# Altium PCB vp40_base_board.PcbDoc (part 1 of 5)
Units mil, origin at the board's own origin, x right, y up, seen from the top; angles counter-clockwise.
Board outline 8267.72 x 4330.71 mil, 4 copper layers (Top Layer, Internal Plane 1, Internal Plane 2, Bottom Layer), stack 30.635 mil thick; 531 components, 391 nets, 1969 pads, 1352 vias.
Unrouted connection lines stored in the file: 302.
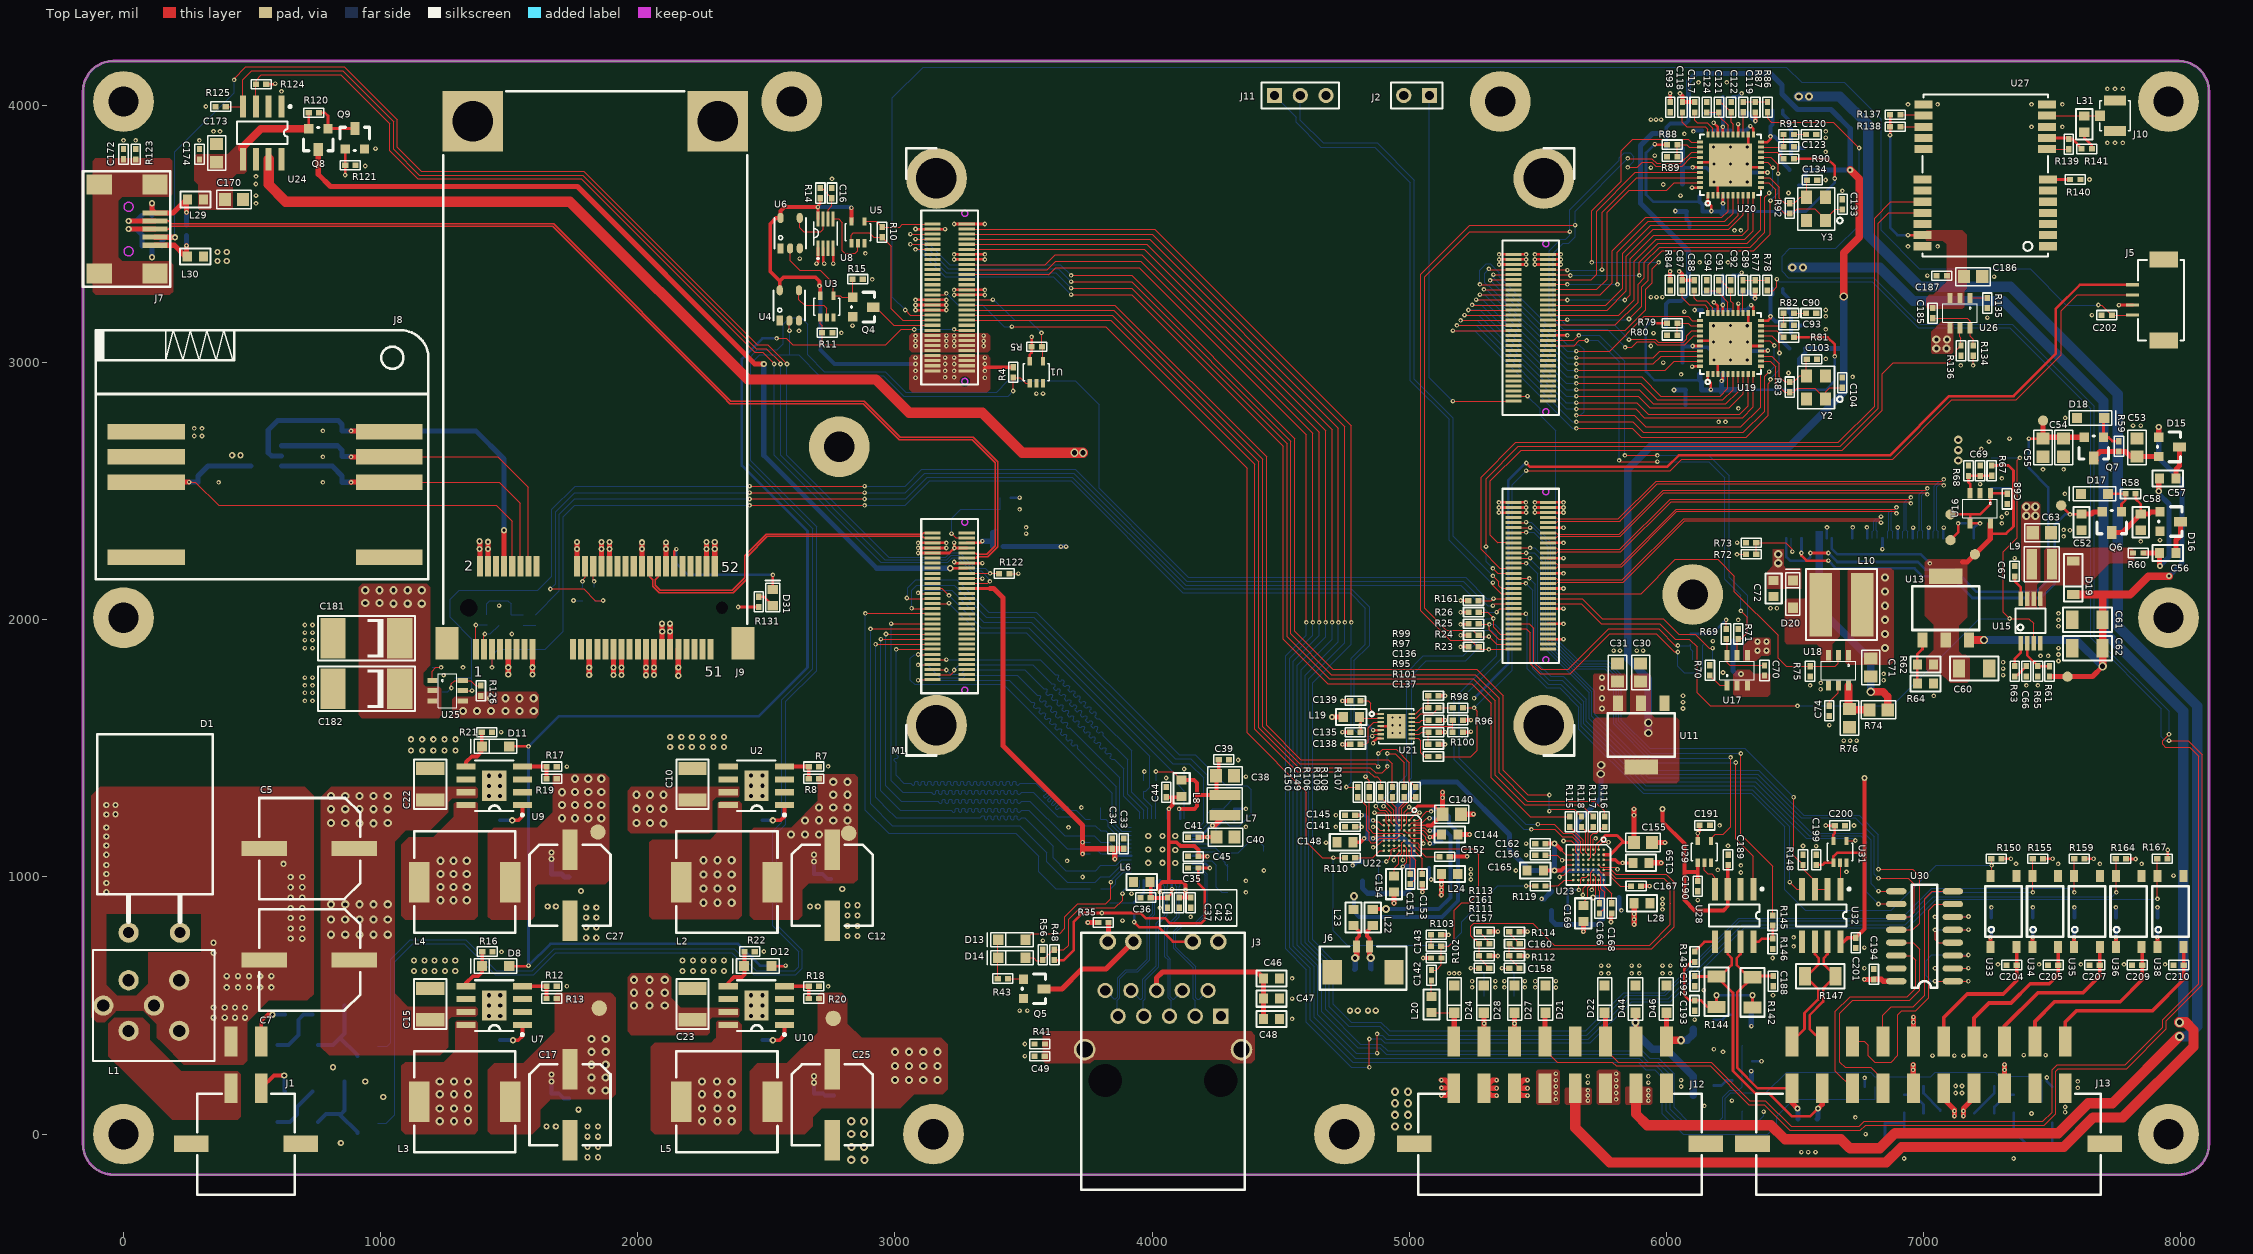
[diagram p0: Top Layer view]
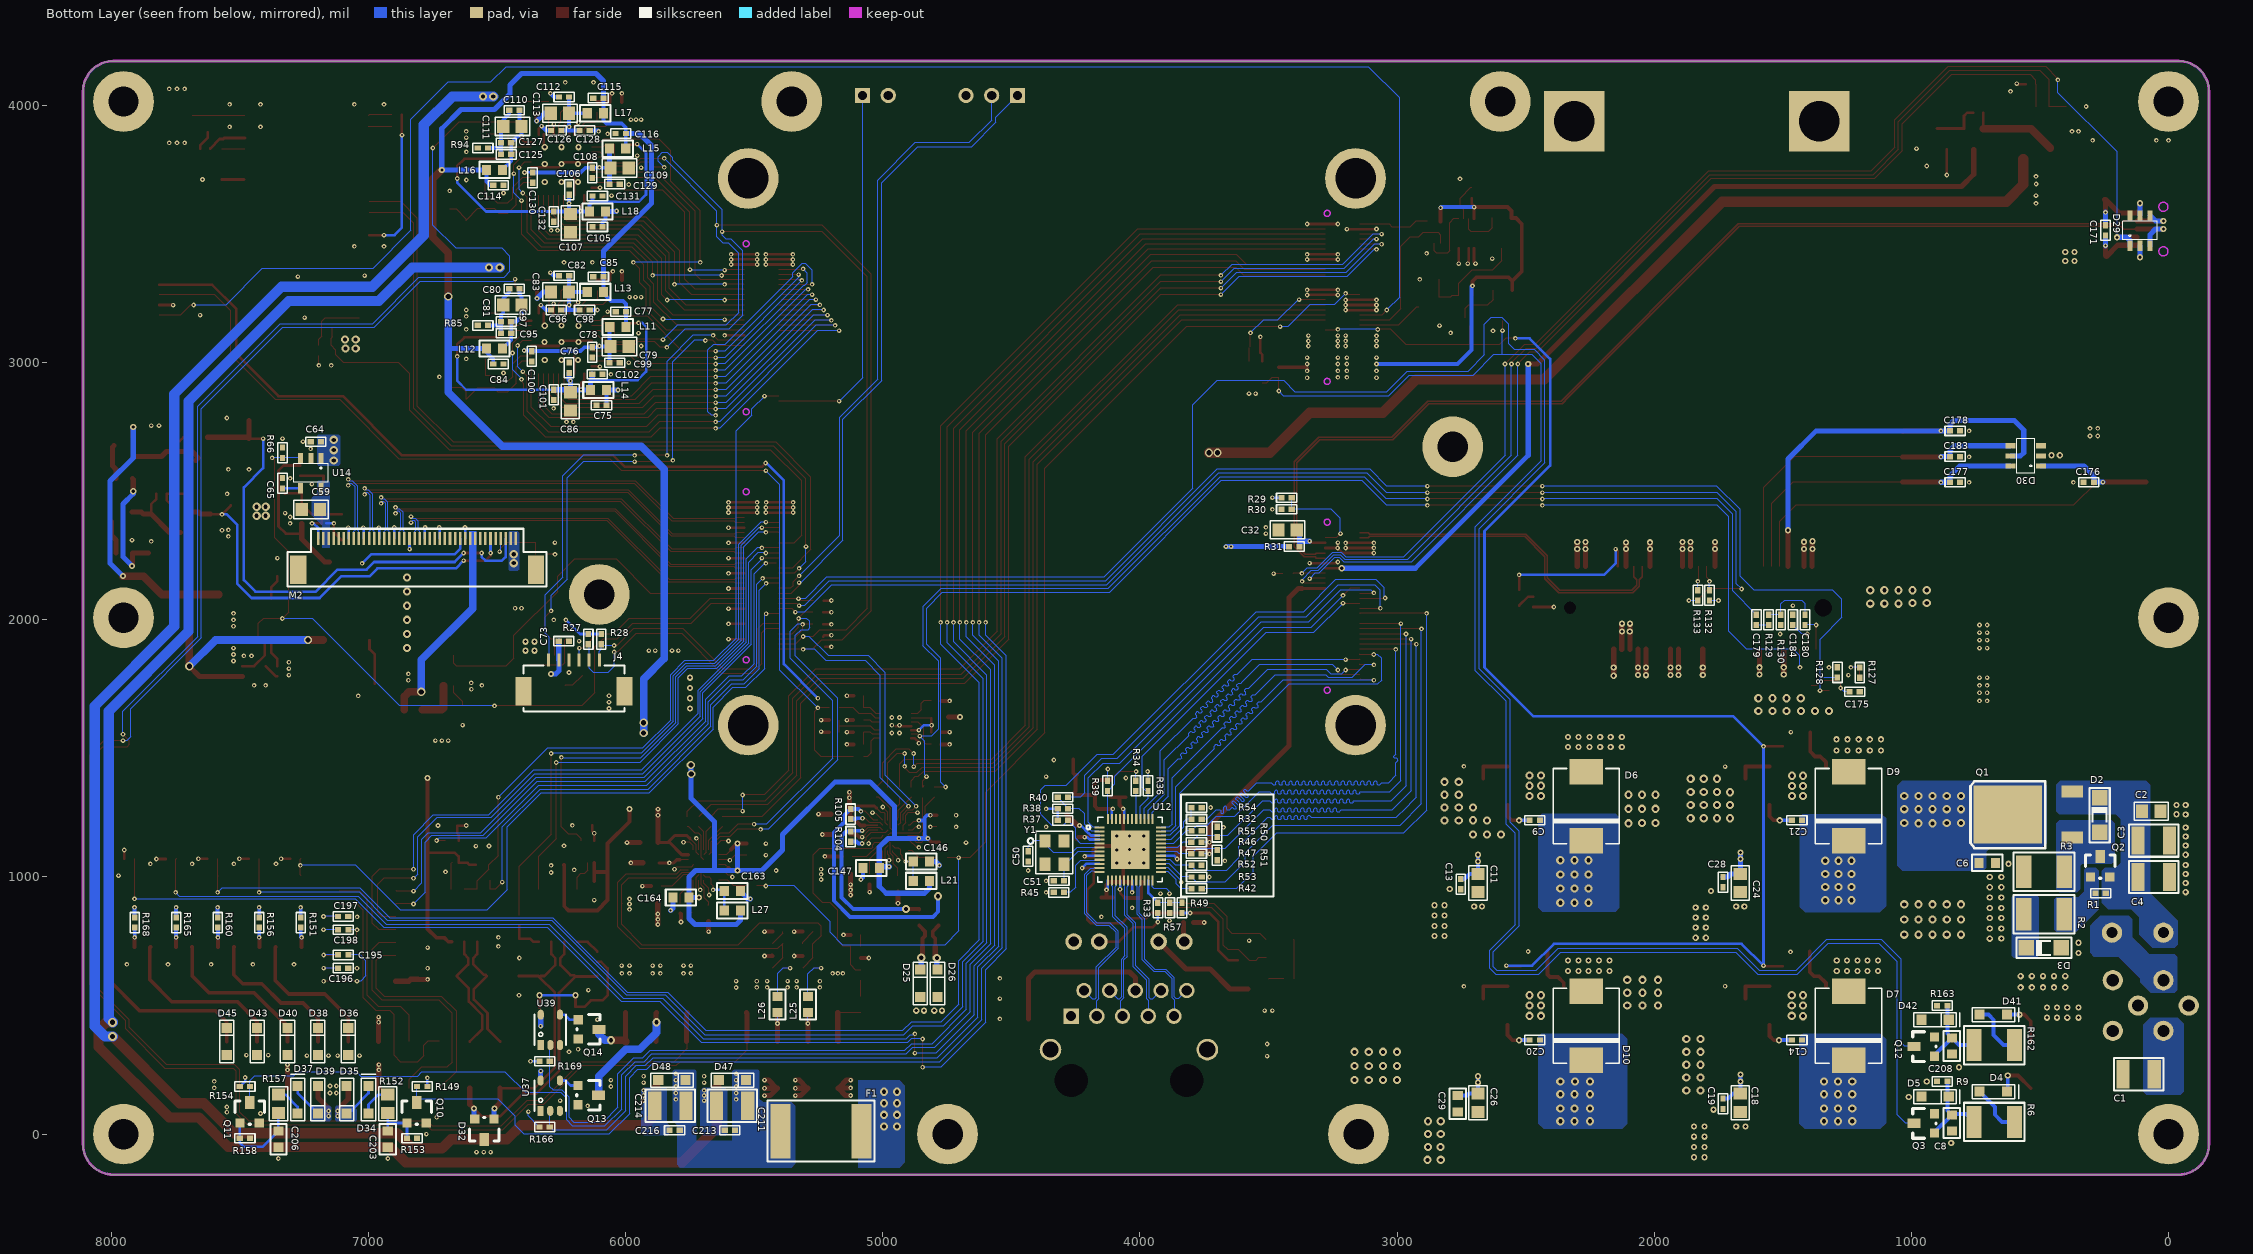
[diagram p1: Bottom Layer view, seen from below]
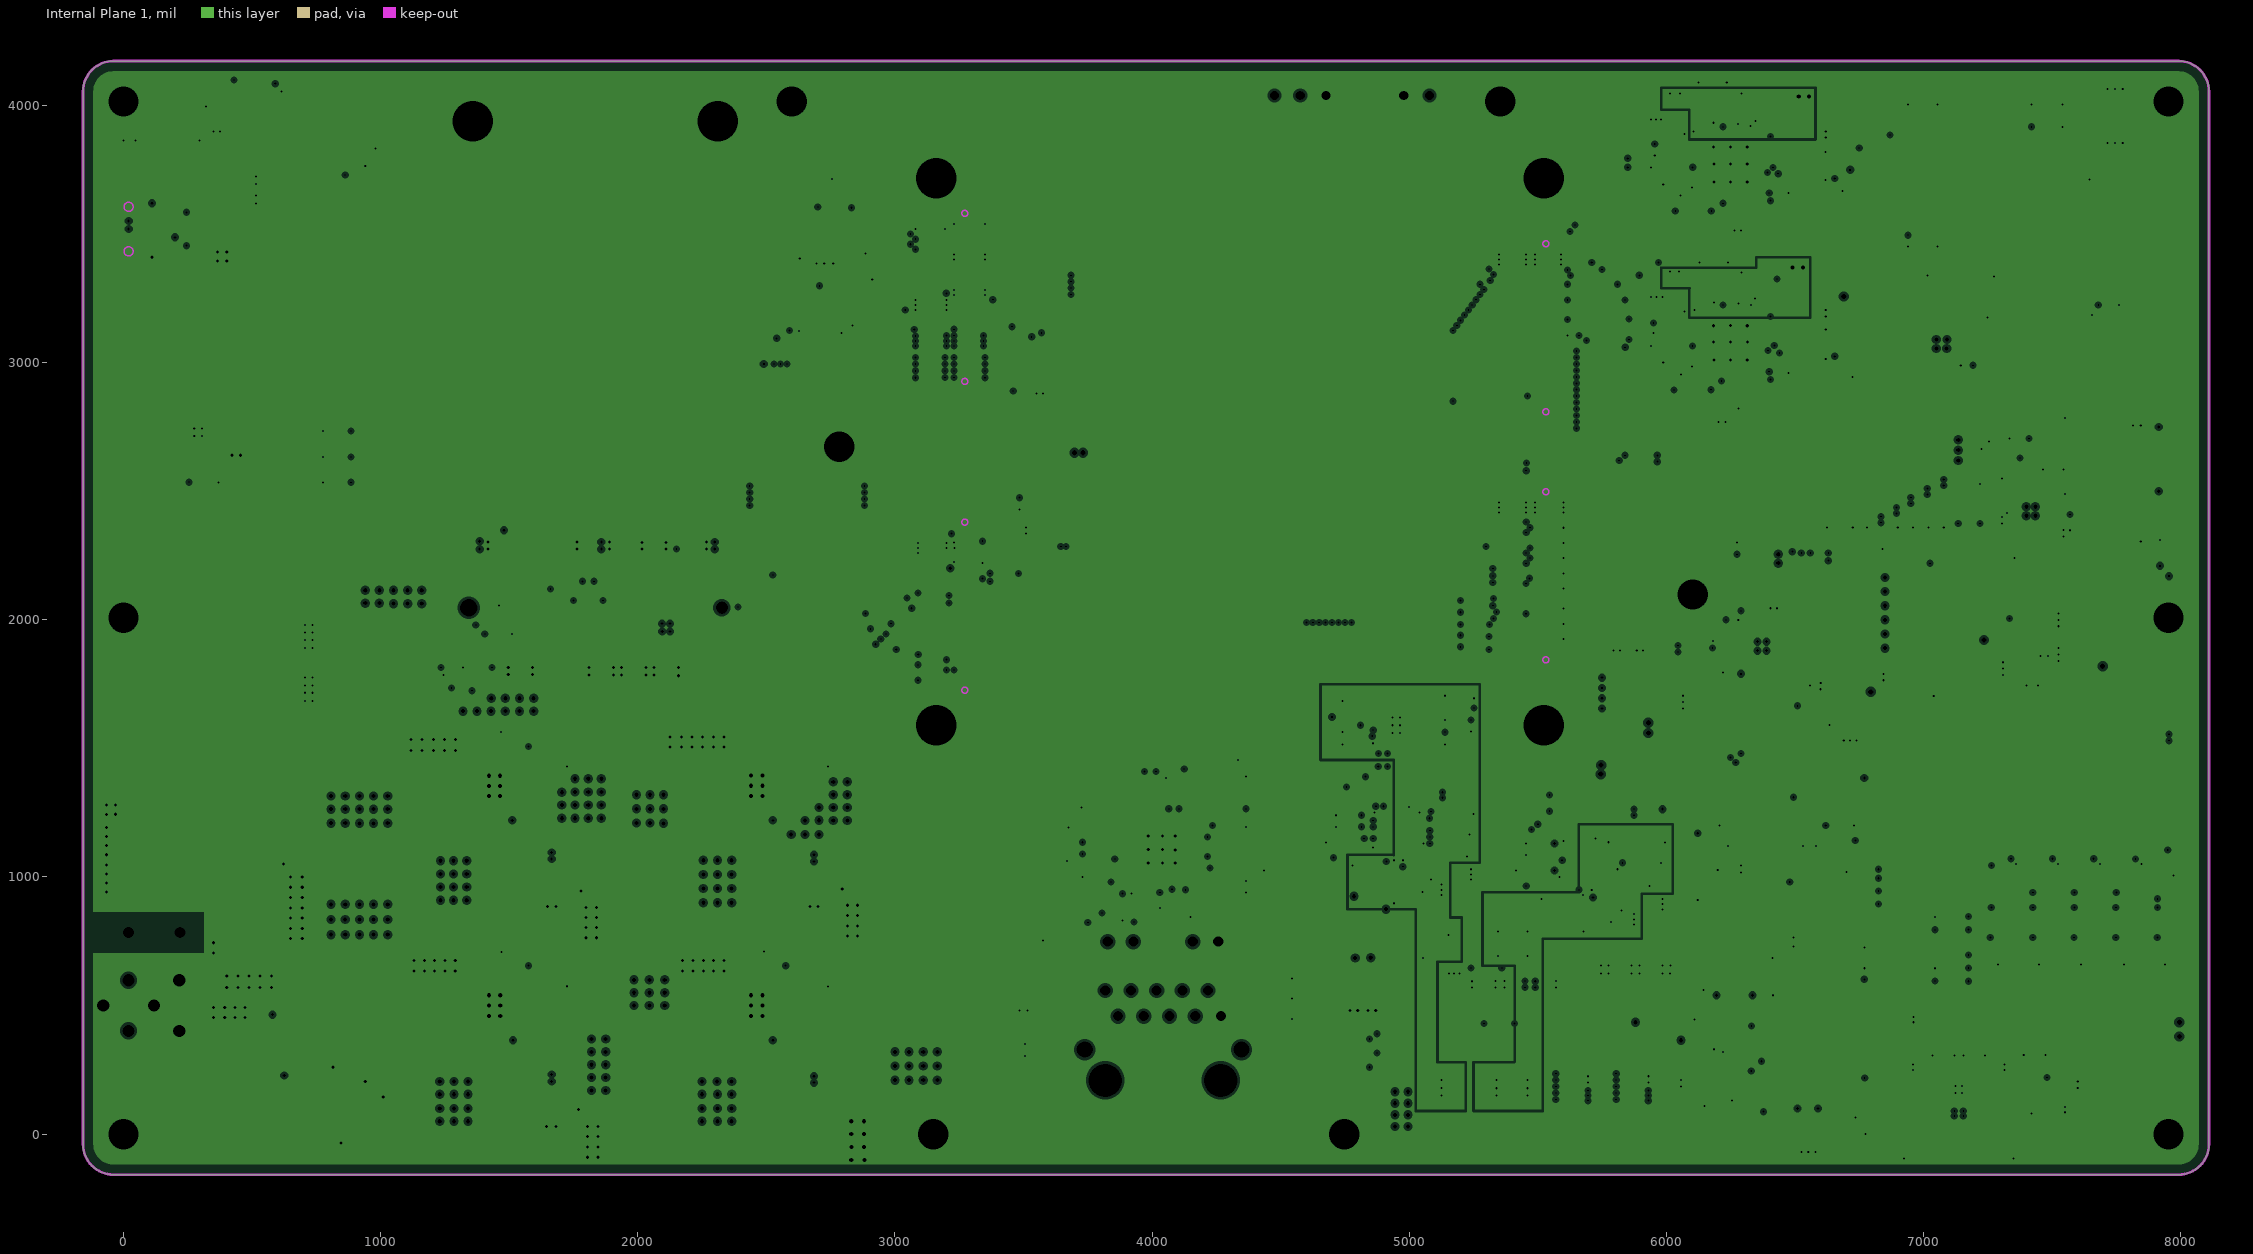
[diagram p2: Internal Plane 1, clearances drawn from the general rule]
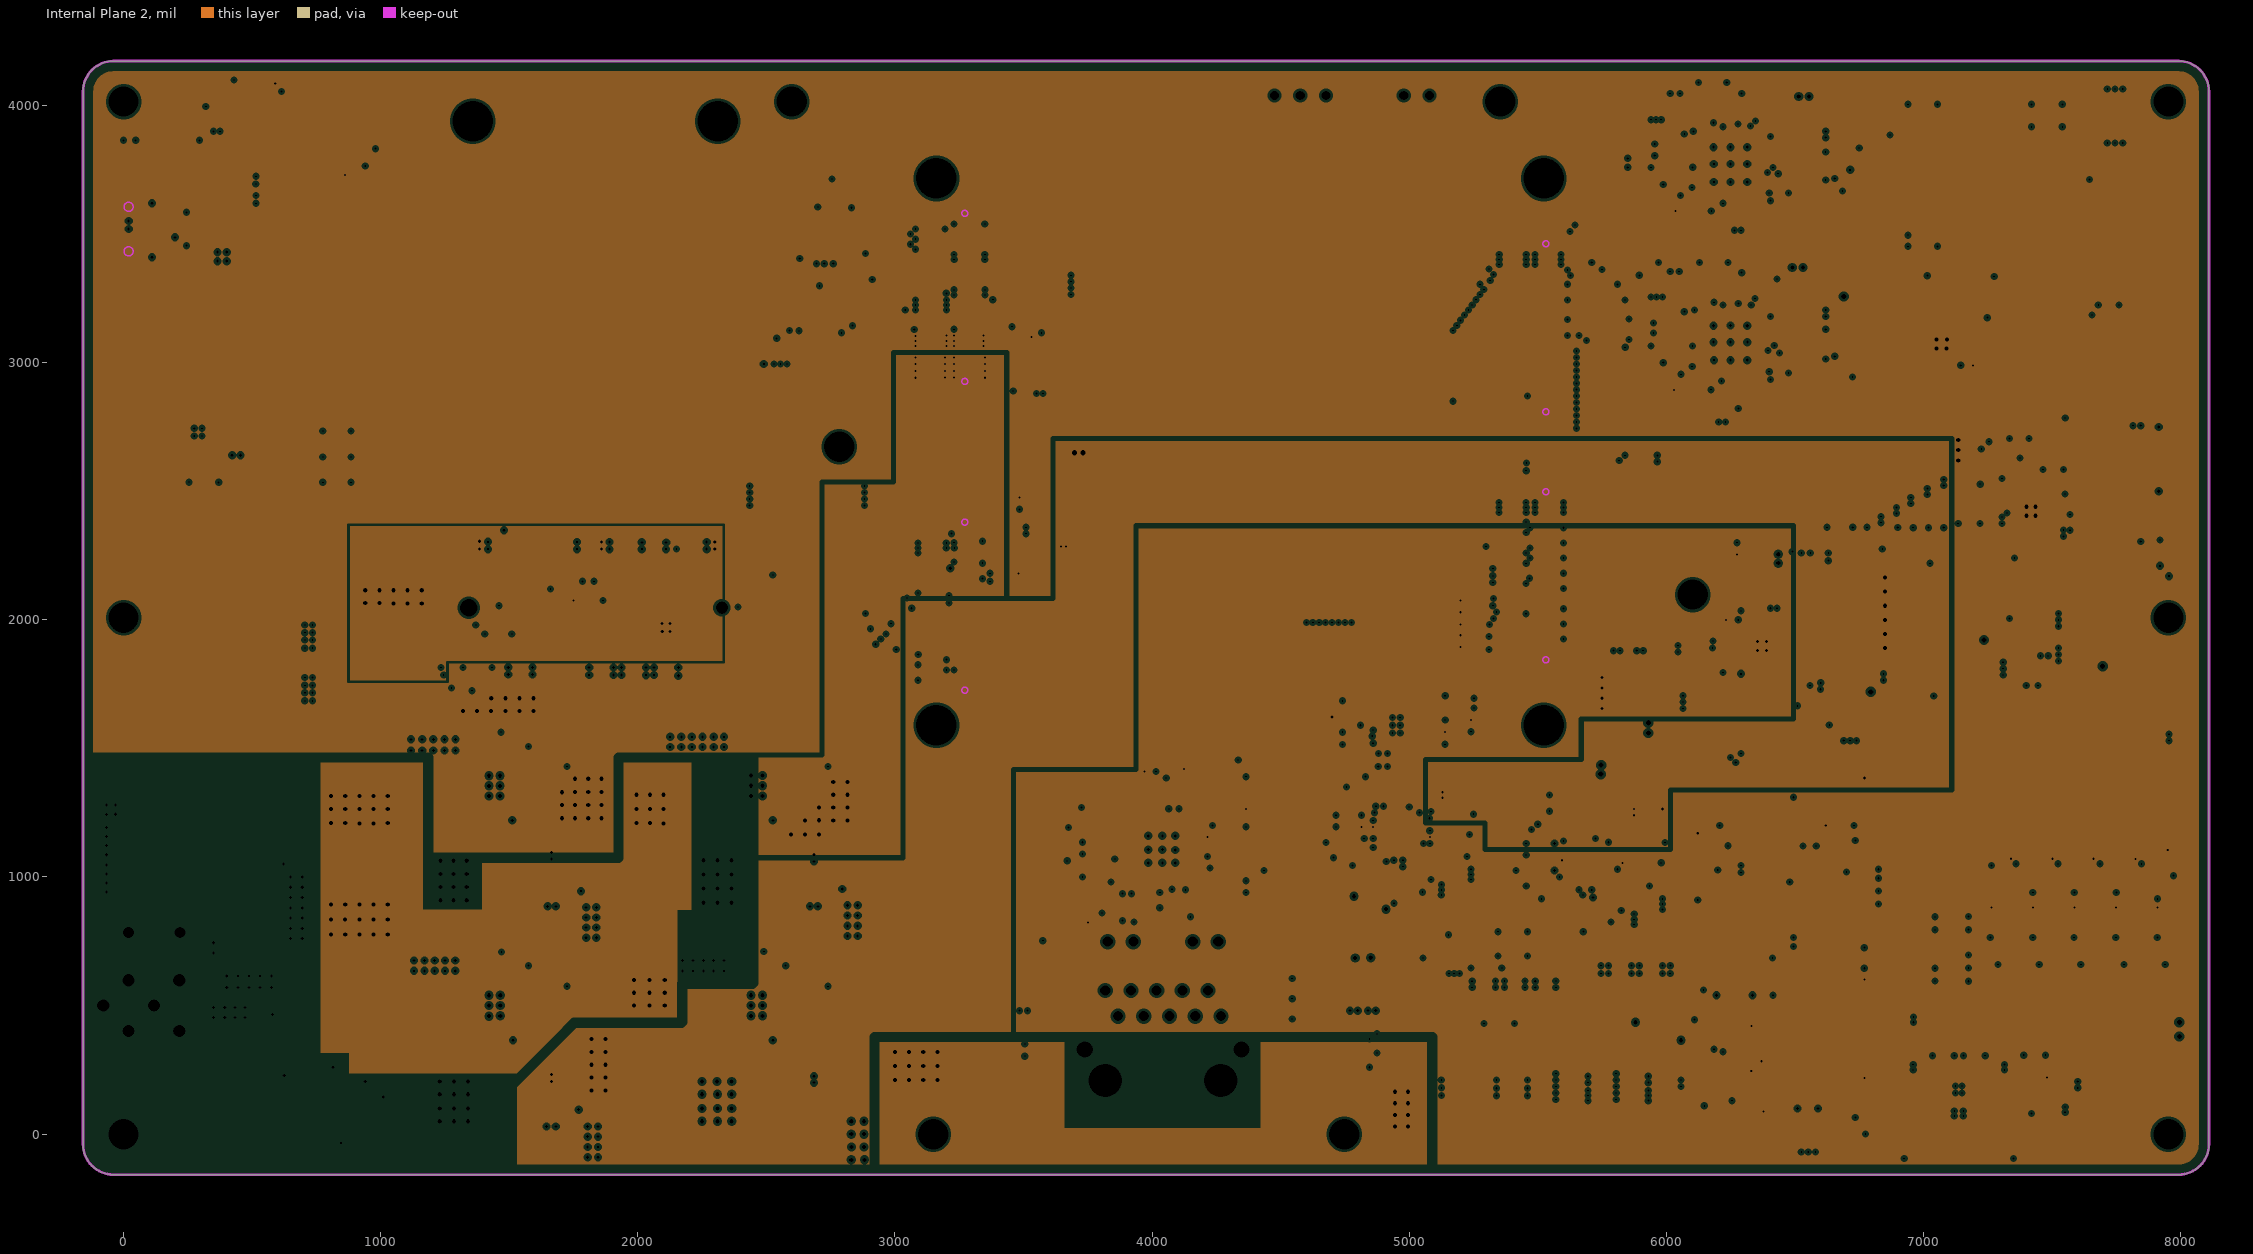
[diagram p3: Internal Plane 2, clearances drawn from the general rule]

## Layer stack, top to bottom
Top Solder: solder mask 0.4, Solder Resist, Dk 3.5
Top Layer: signal copper 1.4
Dielectric 1: core 10, FR-4, Dk 4.2
Internal Plane 1: plane copper 1.4173
Dielectric 3: prepreg 5, Dk 4.2
Internal Plane 2: plane copper 1.4173
Dielectric 2: core 10, Dk 4.2
Bottom Layer: signal copper 1.4
Bottom Solder: solder mask 0.4, Solder Resist, Dk 3.5

## Board outline
-157.48,-39.37 -157.48,4055.12 cw(c-39.37,4055.12) -39.37,4173.23 7992.13,4173.23 cw(c7992.13,4055.12) 8110.24,4055.12 8110.24,-39.37 cw(c7992.13,-39.37) 7992.13,-157.48 -39.37,-157.48 cw(c-39.37,-39.37)

## Design rules (kind name [scope] priority, off if disabled: settings)
Clearance Clearance_2 [InComponent('U22') OR InComponent('U23')] p1: gap=3
Clearance Clearance_1 [InDifferentialPairClass('USB_DIFF')] p2: gap=3.7
Clearance [All] p3: gap=5
ComponentClearance [All] p1: gap=0 collisioncheckmode=3 verticalgap=0 showdistances=FALSE
DiffPairsRouting DiffPairsRouting_3 [InDifferentialPairClass('SPK_DIFF')] p1: maxlimit=15 minlimit=3 mostfreqgap=15 toplayer_minwidth=3 toplayer_maxwidth=20 toplayer_prefwidth=20 bottomlayer_minwidth=3 bottomlayer_maxwidth=20 bottomlayer_prefwidth=20 maxuncoupledlength=500
DiffPairsRouting DiffPairsRouting_2 [InDifferentialPairClass('CAN_RS485_DIFF')] p2: maxlimit=10 minlimit=10 mostfreqgap=10 toplayer_minwidth=10 toplayer_maxwidth=20 toplayer_prefwidth=10 bottomlayer_minwidth=10 bottomlayer_maxwidth=20 bottomlayer_prefwidth=10 maxuncoupledlength=500
DiffPairsRouting DiffPairsRouting_1 [InDifferentialPairClass('LVDS_RGMII_DIFF')] p3: maxlimit=5.2 minlimit=5.2 mostfreqgap=5.2 toplayer_minwidth=3.82 toplayer_maxwidth=3.82 toplayer_prefwidth=3.82 bottomlayer_minwidth=3.82 bottomlayer_maxwidth=3.82 bottomlayer_prefwidth=3.82 maxuncoupledlength=500
DiffPairsRouting [InDifferentialPairClass('USB_DIFF')] p4: maxlimit=3.7 minlimit=3.7 mostfreqgap=3.7 toplayer_minwidth=5.3 toplayer_maxwidth=20 toplayer_prefwidth=5.3 bottomlayer_minwidth=5.3 bottomlayer_maxwidth=20 bottomlayer_prefwidth=5.3 maxuncoupledlength=500
PlaneClearance PlaneClearance_5 [InNet('VBAT') OR  InNet('NetC20_1') OR InNet('REV-SIG') OR InNet('ACC-INPUT') OR InNet('NetD34_1') OR InNet('NetD37_1') OR InNet('NetD44_2') OR InNet('NetD46_2')] p1: clearance=20
PlaneClearance PlaneClearance_6 [InNet('12V-CAM')] p2: clearance=20
PlaneClearance PlaneClearance_4 [InPadClass('MT')] p3: clearance=39.37
PlaneClearance PlaneClearance_3 [InPadClass('J9')] p4: clearance=20
PlaneClearance PlaneClearance_2 [InPadClass('J3')] p5: clearance=39.37
PlaneClearance PlaneClearance_1 [InComponent('L1')] p6: clearance=39.37
PlaneClearance [All] p7: clearance=10
PlaneConnect PlaneConnect_3 [InPadClass('MT')] p1: planeconnectstyle=Direct reliefexpansion=20 reliefentries=4 reliefconductorwidth=10 reliefairgap=10
PlaneConnect PlaneConnect_2 [IsVia] p2: planeconnectstyle=Direct reliefexpansion=20 reliefentries=4 reliefconductorwidth=10 reliefairgap=10
PlaneConnect PlaneConnect_1 [InComponent('L1')] p3: planeconnectstyle=Relief reliefexpansion=20 reliefentries=4 reliefconductorwidth=25 reliefairgap=20
PlaneConnect [All] p4: planeconnectstyle=Relief reliefexpansion=20 reliefentries=4 reliefconductorwidth=20 reliefairgap=20
PolygonConnect [All] p1: connectstyle=Direct reliefconductorwidth=10 reliefentries=4 polygonreliefangle="90 Angle" airgapwidth=10
RoomDefinition 06-VIDEO_IN_ADC_2 [InComponentClass('06-VIDEO_IN_ADC_2')] p1: confinementstyle=ConfineIn formatcopy=TRUE lockcomponents=FALSE outline 5861.39,3412.61 6825.77,3412.61 6825.77,4093.71 5861.39,4093.71
RoomDefinition 05-VIDEO_IN_ADC_1 [InComponentClass('05-VIDEO_IN_ADC_1')] p2: confinementstyle=ConfineIn formatcopy=TRUE lockcomponents=FALSE outline 5861.26,2718 6825.64,2718 6825.64,3399.1 5861.26,3399.1
RoutingVias [All] p1: holewidth=8 width=18 viastyle="Through Hole" minholewidth=8 minwidth=18 maxholewidth=20 maxwidth=40
SolderMaskExpansion [All] p1: expansion=4
Width [All] p1: maxlimit=200 minlimit=3 preferedwidth=4.7 minimp=50.000000 maximp=50.000000 favimp=50.000000
26 further rules are at their usual default settings.

## Classes and differential pairs
component class 14-CONNECTOR: C211 C213 C214 C216 D47 D48 F1 J12 J13
component class 13-IO: C202 C203 C204 C205 C206 C207 C208 C209 C210 D34 D35 D36 D37 D38 D39 D40 D41 D42 D43 D44 D45 D46 J5 Q10 Q11 Q12 Q13 Q14 R149 R150 R151 R152 R153 R154 R155 R156 R157 R158 R159 R160 R161 R162 R163 R164 R165 R166 R167 R168 R169 U33 U34 U35 U36 U37 U38 U39
component class 12-UART_CAN: C188 C189 C190 C191 C192 C193 C194 C195 C196 C197 C198 C199 C200 C201 D32 J11 R142 R143 R144 R145 R146 R147 R148 U28 U29 U30 U31 U32
component class 11-GPS: C185 C186 C187 J10 L31 R134 R135 R136 R137 R138 R139 R140 R141 U26 U27
component class 10-CELLULAR_COMM: C175 C176 C177 C178 C179 C180 C181 C182 C183 C184 D30 D31 J8 J9 R126 R127 R128 R129 R130 R131 R132 R133 U25
component class 09-USB: C170 C171 C172 C173 C174 D29 J7 L29 L30 Q8 Q9 R120 R121 R122 R123 R124 R125 U24
component class 08-AUDIO_AUX: C155 C156 C157 C158 C159 C160 C161 C162 C163 C164 C165 C166 C167 C168 C169 D27 D28 L25 L26 L27 L28 R111 R112 R113 R114 R115 R116 R117 R118 R119 U23
component class 07-AUDIO_MAIN: C135 C136 C137 C138 C139 C140 C141 C142 C143 C144 C145 C146 C147 C148 C149 C150 C151 C152 C153 C154 D24 D25 D26 J6 L19 L20 L21 L22 L23 L24 R95 R96 R97 R98 R99 R100 R101 R102 R103 R104 R105 R106 R107 R108 R109 R110 U21 U22
component class 06-VIDEO_IN_ADC_2: C105 C106 C107 C108 C109 C110 C111 C112 C113 C114 C115 C116 C117 C118 C119 C120 C121 C122 C123 C124 C125 C126 C127 C128 C129 C130 C131 C132 C133 C134 D22 L15 L16 L17 L18 R86 R87 R88 R89 R90 R91 R92 R93 R94 U20 Y3
component class 05-VIDEO_IN_ADC_1: C75 C76 C77 C78 C79 C80 C81 C82 C83 C84 C85 C86 C87 C88 C89 C90 C91 C92 C93 C94 C95 C96 C97 C98 C99 C100 C101 C102 C103 C104 D21 L11 L12 L13 L14 R77 R78 R79 R80 R81 R82 R83 R84 R85 U19 Y2
component class 04-LCD: C52 C53 C54 C55 C56 C57 C58 C59 C60 C61 C62 C63 C64 C65 C66 C67 C68 C69 C70 C71 C72 C73 C74 D15 D16 D17 D18 D19 D20 J4 L9 L10 M2 Q6 Q7 R58 R59 R60 R61 R62 R63 R64 R65 R66 R67 R68 R69 R70 R71 R72 R73 R74 R75 R76 U13 U14 U15 U16 U17 U18
component class 03-ETHERNET: C33 C34 C35 C36 C37 C38 C39 C40 C41 C42 C43 C44 C45 C46 C47 C48 C49 C50 C51 D13 D14 J3 L6 L7 L8 Q5 R32 R33 R34 R35 R36 R37 R38 R39 R40 R41 R42 R43 R45 R46 R47 R48 R49 R50 R51 R52 R53 R54 R55 R56 R57 U12 Y1
component class 02-CPU_BOARD: C32 J2 M1 R23 R24 R25 R26 R27 R28 R29 R30 R31
component class 01-POWER: C8 C9 C10 C11 C12 C13 C14 C15 C16 C17 C18 C19 C20 C21 C22 C23 C24 C25 C26 C27 C28 C29 C30 C31 D4 D5 D6 D7 D8 D9 D10 D11 D12 L2 L3 L4 L5 Q3 Q4 R4 R5 R6 R7 R8 R9 R10 R11 R12 R13 R14 R15 R16 R17 R18 R19 R20 R21 R22 U1 U2 U3 U4 U5 U6 U7 U8 U9 U10 U11
component class 00-SURGE_PROTECT: C1 C2 C3 C4 C5 C6 C7 D1 D2 D3 J1 L1 Q1 Q2 R1 R2 R3
differential pair class USB_DIFF: OTG USB-HOST
differential pair class LVDS_RGMII_DIFF: LVDS0-CLK LVDS0-TX0 LVDS0-TX1 LVDS0-TX2 LVDS0-TX3 RGMII-TRX0 RGMII-TRX1 RGMII-TRX2 RGMII-TRX3
differential pair class CAN_RS485_DIFF: CAN RS485
differential pair class SPK_DIFF: SPK SPKF
pad class MT: Free-MT1 Free-MT2 Free-MT3 Free-MT4 Free-MT5 Free-MT6 Free-MT7 Free-MT8 Free-MT9 Free-MT10 Free-MT11 Free-MT12 J9-MT17 J9-MT18 M1-MT13 M1-MT14 M1-MT15 M1-MT16
pad class J3: J3-H1 J3-H2 J3-SH1 J3-SH2
pad class J9: J9-H1 J9-H2
net class RGMII-TX: RGMII-TXCLK RGMII-TXD0 RGMII-TXD1 RGMII-TXD2 RGMII-TXD3 RGMII-TXEN
net class RGMII-RX: RGMII-RXCLK RGMII-RXD0 RGMII-RXD1 RGMII-RXD2 RGMII-RXD3 RGMII-RXDV
differential pair USB-HOST: +USB-HOST_P -USB-HOST_N
differential pair SPK: +SPK_P -SPK_N
differential pair SPKF: +SPKF_P -SPKF_N
differential pair RS485: +RS485_P -RS485_N
differential pair RGMII-TRX3: +RGMII-TRX3_P -RGMII-TRX3_N
differential pair RGMII-TRX2: +RGMII-TRX2_P -RGMII-TRX2_N
differential pair RGMII-TRX1: +RGMII-TRX1_P -RGMII-TRX1_N
differential pair RGMII-TRX0: +RGMII-TRX0_P -RGMII-TRX0_N
differential pair OTG: +OTG_P -OTG_N
differential pair LVDS0-TX3: +LVDS0-TX3_P -LVDS0-TX3_N
differential pair LVDS0-TX2: +LVDS0-TX2_P -LVDS0-TX2_N
differential pair LVDS0-TX1: +LVDS0-TX1_P -LVDS0-TX1_N
differential pair LVDS0-TX0: +LVDS0-TX0_P -LVDS0-TX0_N
differential pair LVDS0-CLK: +LVDS0-CLK_P -LVDS0-CLK_N
differential pair CAN: +CAN_P -CAN_N

## Components (designator, comment, footprint, x,y, rotation, side; value= is the part's Value field where it differs from the comment)
C1 "0.22uF/250V" 1210 55.12,232.28 r0 bottom
C2 "100pF/250V" 0805 102.36,1255.91 r180 bottom
C3 "0.22uF/250V" 1210 118.11,1141.73 r180 bottom
C4 "0.22uF/250V" 1210 118.11,1000 r180 bottom
C5 "220uF/50V" DL-10*10.5 724.41,1110.24 r270 top
C6 "0.22uF/50V" 0603 704.72,1055.12 r90 bottom
C7 "220uF/50V" DL-10*10.5 724.41,677.17 r270 top
C8 "0.47uF/50V" 0603 842.52,43.31 r180 bottom
C9 "0.01uF/50V" 0402 2464.57,1220.47 r180 bottom
C10 "10uF/50V" 1210 2212.6,1299.21 r90 top
C11 "4.7uF/25V" 0805 2685.04,940.95 r90 bottom
C12 "220uF/25V" DL-8*10.5 2755.91,968.5 r0 top
C13 "0.22uF/10V" 0402 2751.97,972.44 r270 bottom
C14 "0.01uF/50V" 0402 1444.88,366.14 r180 bottom (schematic designator C9)
C15 "10uF/50V" 1210 1192.91,444.88 r90 top (schematic designator C10)
C16 "0.22uF/10V" 0402 2755,3660 r270 top
C17 "220uF/25V" DL-8*10.5 1736.22,114.17 r0 top (schematic designator C12)
C18 "4.7uF/25V" 0805 1665.35,86.61 r90 bottom (schematic designator C11)
C19 "0.22uF/10V" 0402 1732.28,118.11 r270 bottom (schematic designator C13)
C20 "0.01uF/50V" 0402 2464.57,366.14 r180 bottom (schematic designator C9)
C21 "0.01uF/50V" 0402 1444.88,1220.47 r180 bottom (schematic designator C9)
C22 "10uF/50V" 1210 1192.91,1299.21 r90 top (schematic designator C10)
C23 "10uF/50V" 1210 2212.6,444.88 r90 top (schematic designator C10)
C24 "4.7uF/25V" 0805 1665.35,940.94 r90 bottom (schematic designator C11)
C25 "220uF/25V" DL-8*10.5 2755.91,114.17 r0 top (schematic designator C12)
C26 "4.7uF/25V" 0805 2685.04,86.61 r90 bottom (schematic designator C11)
C27 "220uF/25V" DL-8*10.5 1736.22,968.5 r0 top (schematic designator C12)
C28 "0.22uF/10V" 0402 1732.28,980.32 r270 bottom (schematic designator C13)
C29 "0.22uF/50V" 0603 2763.78,118.11 r0 bottom (schematic designator C13)
C30 "10uF/10V" 0805 5900,1760 r90 top
C31 "10uF/10V" 0805 5810,1760 r90 top
C32 "4.7uF/25V" 0805 3390,2350 r0 bottom
C33 "1uF/10V" 0402 3890,1130 r270 top
C34 "0.1uF/50V" 0402 3845,1130 r270 top
C35 "1uF/10V" 0402 4160,1035 r0 top
C36 "1uF/10V" 0402 3975,920 r0 top
C37 "0.1uF/50V" 0402 4060,900 r90 top
C38 "10uF/10V" 0805 4248.03,1393.7 r0 top
C39 "0.1uF/50V" 0402 4279.53,1456.69 r180 top
C40 "10uF/10V" 0805 4250,1155 r0 top
C41 "0.1uF/50V" 0402 4160,1155 r0 top
C42 "0.1uF/50V" 0402 4105,900 r90 top
C43 "0.1uF/50V" 0402 4150,900 r90 top
C44 "0.1uF/50V" 0402 4055,1330 r270 top
C45 "0.1uF/50V" 0402 4160,1080 r0 top
C46 "0.1uF(DNP)" 0603 4464.57,605.55 r90 top
C47 "0.1uF(DNP)" 0603 4464.57,526.81 r90 top
C48 "0.1uF(DNP)" 0603 4464.57,448.07 r90 top
C49 "0.1uF/50V" 0402 3562.99,303.15 r180 top
C50 "22pF/50V" 0402 4435,1080 r90 bottom
C51 "22pF/50V" 0402 4315,985 r180 bottom
C52 "1uF/25V" 0603 7615,2380 r180 top
C53 "1uF/50V" 0805 7830,2635 r90 top
C54 "1uF/50V" 0805 7545,2705 r270 top
C55 "1uF/50V" 0805 7465,2705 r270 top
C56 "1uF/25V" 0603 7950,2260 r90 top
C57 "1uF/25V" 0603 7950,2550 r270 top
C58 "1uF/25V" 0603 7845,2380 r0 top
C59 "10uF/10V" 0805 7188.98,2429.13 r0 bottom
C60 "10uF/25V" 1206 7137.8,1811.02 r0 top
C61 "10uF/25V" 1206 7696.85,2000 r180 top
C62 "10uF/25V" 1206 7696.85,1889.76 r180 top
C63 "10uF/10V" 0805 7425.2,2338.58 r0 top
C64 "0.1uF/50V" 0402 7204.72,2692.91 r180 bottom
C65 "0.01uF/50V" 0402 7334.65,2531.5 r270 bottom
C66 "3300pF/50V" 0402 7400,1800 r90 top
C67 "0.1uF/50V" 0402 7354.33,2188.98 r270 top
C68 "1uF/10V" 0402 7325,2470 r90 top
C69 "0.1uF/50V" 0402 7220,2580 r270 top
C70 "0.47uF/6.3V" 0402 6381.89,1803.15 r270 top
C71 "10uF/10V" 0805 6795,1850 r270 top
C72 "1uF/25V" 0603 6417.32,2122.05 r0 top
C73 "0.1uF/50V" 0402 6240.16,1917.32 r0 bottom
C74 "0.22uF/10V" 0402 6633.86,1645.67 r90 top
C75 "0.1uF/50V" 0402 6094.05,2834.65 r180 bottom
C76 "0.1uF/50V" 0402 6220.03,2980.31 r270 bottom
C77 "0.1uF/50V" 0402 6018.55,3198.31 r180 bottom
C78 "0.1uF/50V" 0402 6130,3040 r90 bottom
C79 "10uF/10V" 0805 6058.61,3062.99 r180 bottom
C80 "0.1uF/50V" 0402 6432.63,3287.4 r180 bottom
C81 "10uF/10V" 0805 6405.07,3224.41 r0 bottom
C82 "0.1uF/50V" 0402 6239.72,3338.58 r180 bottom
C83 "10uF/10V" 0805 6220.03,3275.59 r0 bottom
C84 "0.1uF/50V" 0402 6495,2995 r0 bottom
C85 "0.1uF/50V" 0402 6105.86,3334.65 r180 bottom
C86 "10uF/10V" 0805 6215,2885 r270 bottom
C87 "0.1uF/50V" 0402 6061.86,3300.67 r270 top
C88 "0.1uF/50V" 0402 6109.1,3300.67 r270 top
C89 "0.1uF/50V" 0402 6298.08,3300.67 r90 top
C90 "0.082uF/50V" 0402 6562.55,3192.91 r0 top
C91 "0.1uF/50V" 0402 6203.59,3300.67 r270 top
C92 "0.1uF/50V" 0402 6250.84,3300.67 r90 top
C93 "0.01uF/50V" 0402 6475.94,3145.67 r0 top
C94 "0.1uF/50V" 0402 6156.35,3300.67 r270 top
C95 "0.01uF/50V" 0402 6465,3115 r0 bottom
C96 "0.01uF/50V" 0402 6270,3205 r0 bottom
C97 "0.1uF/50V" 0402 6465,3160 r0 bottom
C98 "0.1uF/50V" 0402 6160,3205 r180 bottom
C99 "0.1uF/50V" 0402 6042.87,3000 r180 bottom
C100 "0.01uF/50V" 0402 6365,3025 r270 bottom
C101 "0.01uF/50V" 0402 6280,2875 r270 bottom
C102 "0.1uF/50V" 0402 6110,2955 r180 bottom
C103 "47pF/50V" 0402 6565.8,3013.27 r0 top
C104 "47pF/50V" 0402 6683.91,2922.72 r90 top
C105 "0.1uF/50V" 0402 6109.69,3528.2 r180 bottom
C106 "0.1uF/50V" 0402 6219.69,3673.2 r270 bottom
C107 "10uF/10V" 0805 6214.69,3578.2 r270 bottom
C108 "0.1uF/50V" 0402 6129.69,3738.2 r90 bottom
C109 "10uF/10V" 0805 6058.74,3757.61 r180 bottom
C110 "0.1uF/50V" 0402 6432.76,3982.02 r180 bottom
C111 "10uF/10V" 0805 6405.2,3919.02 r0 bottom
C112 "0.1uF/50V" 0402 6239.84,4033.2 r180 bottom
C113 "10uF/10V" 0805 6220.16,3970.2 r0 bottom
C114 "0.1uF/50V" 0402 6495,3690 r0 bottom
C115 "0.1uF/50V" 0402 6105.98,4029.26 r180 bottom
C116 "0.1uF/50V" 0402 6019.37,3891.46 r180 bottom
C117 "0.1uF/50V" 0402 6109.92,3993.83 r270 top
C118 "0.1uF/50V" 0402 6062.68,3993.83 r270 top
C119 "0.1uF/50V" 0402 6298.9,3993.83 r90 top
C120 "0.082uF/50V" 0402 6562.68,3887.53 r0 top
C121 "0.1uF/50V" 0402 6204.41,3993.83 r270 top
C122 "0.1uF/50V" 0402 6251.65,3993.83 r90 top
C123 "0.01uF/50V" 0402 6476.06,3840.28 r0 top
C124 "0.1uF/50V" 0402 6157.17,3993.83 r270 top
C125 "0.01uF/50V" 0402 6465,3810 r0 bottom
C126 "0.01uF/50V" 0402 6269.69,3903.2 r0 bottom
C127 "0.1uF/50V" 0402 6465,3855 r0 bottom
C128 "0.1uF/50V" 0402 6159.69,3903.2 r180 bottom
C129 "0.1uF/50V" 0402 6042.99,3694.61 r180 bottom
C130 "0.01uF/50V" 0402 6361.95,3720 r270 bottom
C131 "0.01uF/50V" 0402 6109.69,3648.2 r180 bottom
C132 "0.1uF/50V" 0402 6279.69,3568.2 r270 bottom
C133 "18pF/50V" 0402 6684.72,3615.87 r90 top
C134 "18pF/50V" 0402 6566.61,3710.36 r0 top
C135 "1uF/10V" 0402 4790.9,1562.99 r180 top
C136 "0.47uF/6.3V" 0402 5094.93,1610.24 r180 top
C137 "0.1uF/50V" 0402 5094.49,1468.5 r180 top
C138 "2.2uF/6.3V" 0402 4790.9,1515.75 r0 top
C139 "0.1uF/50V" 0402 4790.9,1685.04 r0 top
C140 "10uF/10V" 0805 5200.8,1244.1 r180 top
C141 "0.1uF/50V" 0402 4770,1195 r180 top
C142 "1uF/10V" 0402 5086.61,618.11 r270 top
C143 "0.1uF/50V" 0402 5105,730 r180 top
C144 "4.7uF/6.3V" 0603 5157.49,1165.36 r270 top
C145 "0.1uF/50V" 0402 4770,1240 r180 top
C146 "4.7uF/6.3V" 0603 4850,1060 r270 bottom
C147 "4.7uF/6.3V" 0603 5045,1035 r90 bottom
C148 "4.7uF/6.3V" 0603 4750,1135 r90 top
C149 "1uF/10V" 0402 4845,1330 r270 top
C150 "1uF/10V" 0402 4800,1330 r270 top
C151 "2.2uF/6.3V" 0402 5003.94,992.13 r90 top
C152 "2.2uF/6.3V" 0402 5137.81,1078.74 r0 top
C153 "2.2uF/6.3V" 0402 5051.18,992.13 r270 top
C154 "4.7uF/6.3V" 0603 4940.94,972.44 r180 top
C155 "10uF/10V" 0805 5944.88,1133.86 r180 top
C156 "0.1uF/50V" 0402 5510,1085 r180 top
C157 "1uF/10V" 0402 5291.34,645.67 r180 top
C158 "1uF/10V" 0402 5409.45,645.67 r180 top
C159 "4.7uF/6.3V" 0603 5901.57,1055.12 r270 top
C160 "0.1uF/50V" 0402 5409.45,740.16 r0 top
C161 "0.1uF/50V" 0402 5291.78,740.16 r0 top
C162 "0.1uF/50V" 0402 5510,1130 r180 top
C163 "4.7uF/6.3V" 0603 5585,945 r270 bottom
C164 "4.7uF/6.3V" 0603 5785,920 r90 bottom
C165 "4.7uF/6.3V" 0603 5490,1025 r90 top
C166 "2.2uF/6.3V" 0402 5740.16,877.95 r90 top
C167 "2.2uF/6.3V" 0402 5881.89,964.57 r0 top
C168 "2.2uF/6.3V" 0402 5787.4,877.95 r270 top
C169 "4.7uF/6.3V" 0603 5677.17,858.27 r180 top
C170 "10uF/10V" 0805 465,3635 r180 top
C171 "0.1uF/50V" 0402 245,3515 r270 bottom
C172 "0.1uF/50V" 0402 0,3811.21 r90 top
C173 "10uF/10V" 0805 362.2,3779.72 r90 top
C174 "0.1uF/50V" 0402 295.28,3811.02 r270 top
C175 "1uF/10V" 0402 1220.47,1720.47 r180 bottom
C176 "33pF/50V" 0402 310,2535 r180 bottom
C177 "33pF/50V" 0402 830,2535 r0 bottom
C178 "0.1uF/50V" 0402 830,2735 r0 bottom
C179 "1uF/10V" 0402 1602.36,2000 r270 bottom
C180 "1uF/10V" 0402 1413.39,2000 r270 bottom
C181 "470uF/6.3V" 7343 944.88,1929.13 r270 top
C182 "470uF/6.3V" 7343 944.88,1732.28 r270 top
C183 "33pF/50V" 0402 830,2635 r0 bottom
C184 "1uF/10V" 0402 1460.63,2000 r270 bottom
C185 "0.47uF/6.3V" 0402 7035.55,3192.91 r90 top
C186 "10uF/10V" 0805 7157.6,3334.65 r0 top
C187 "0.1uF/50V" 0402 7070.98,3338.58 r0 top
C188 "56pF/50V" 0402 6415,595 r270 top
C189 "0.1uF/50V" 0402 6240.16,1066.93 r270 top
C190 "0.1uF/50V" 0402 6122.05,964.57 r90 top
C191 "0.1uF/50V" 0402 6149.61,1200.79 r180 top
C192 "56pF/50V" 0402 6110,595 r90 top
C193 "1000pF(DNP)" 0402 6110,500 r90 top
C194 "0.1uF/50V" 0402 6807.09,622.05 r270 top
C195 "0.1uF/50V" 0402 7098.43,696.85 r180 bottom
C196 "0.1uF/50V" 0402 7098.43,645.67 r0 bottom
C197 "0.1uF/50V" 0402 7098.43,846.46 r0 bottom
C198 "0.1uF/50V" 0402 7098.43,794.49 r180 bottom
C199 "0.1uF/50V" 0402 6582.68,1066.93 r270 top
C200 "0.1uF/50V" 0402 6675,1200 r180 top
C201 "0.1uF/50V" 0402 6736.46,744.09 r270 top
C202 "0.1uF/50V" 0402 7712.6,3185.04 r0 top
C203 "0.47uF/50V" 0603 6925.2,-19.68 r180 bottom
C204 "0.1uF/50V" 0402 7342.52,657.48 r0 top
C205 "0.1uF/50V" 0402 7503.94,657.48 r0 top
C206 "0.47uF/50V" 0603 7350.39,-19.68 r180 bottom
C207 "0.1uF/50V" 0402 7665.35,657.48 r0 top
C208 "0.47uF/50V" 0603 842.52,342.52 r180 bottom (schematic designator C8)
C209 "0.1uF/50V" 0402 7830.71,657.48 r0 top
C210 "0.1uF/50V" 0402 7992.13,657.48 r0 top
C211 "10uF/50V" 1210 5525,110 r0 bottom
C213 "0.1uF/50V" 0402 5595,15 r180 bottom
C214 "10uF/50V" 1210 5765,110 r0 bottom
C216 "0.1uF/50V" 0402 5810,15 r180 bottom
D1 "C3D03060F" C3D03060F 19.68,783.46 r0 top locked
D2 "ZMM55-C12" MINI-MELF 267.72,1173.23 r90 bottom
D3 "ZMM55-C36" MINI-MELF 417.32,724.41 r0 bottom
D4 "MM3Z6V2ST1G" SOD323F 681.1,165.35 r0 bottom
D5 "1N5819HW" 1N5819 854.33,145.67 r0 bottom
D6 "MBRS360T3G" SMC 2263.78,1409.45 r90 bottom
D7 "MBRS360T3G" SMC 1244.09,555.12 r90 bottom (schematic designator D6)
D8 "1N5819HW" 1N5819 1393.7,653.54 r0 top (schematic designator D11)
D9 "MBRS360T3G" SMC 1244.09,1409.45 r90 bottom (schematic designator D6)
D10 "MBRS360T3G" SMC 2263.78,555.12 r90 bottom (schematic designator D6)
D11 "1N5819HW" 1N5819 1393.7,1507.87 r0 top
D12 "1N5819HW" 1N5819 2413.39,653.54 r0 top (schematic designator D11)
D13 "1N5819HW" 1N5819 3401.57,755.91 r0 top
D14 "1N5819HW" 1N5819 3401.57,686.09 r0 top
D15 "BAT54SLT1G" SOT-23 7915,2710 r270 top
D16 "BAT54SLT1G" SOT-23 7920,2420 r270 top
D17 "MM3Z7V5B" SOD323F 7665,2490 r0 top
D18 "MM3Z22VB" SOD323F 7650,2785 r180 top
D19 "MBR120LSFT1G" SOD123FL 7582.68,2098.43 r90 top
D20 "1N5819HW" 1N5819 6492.13,2153.54 r270 top
D21 "PESD5V0L1BA" SOD323 5530,525 r270 top
D22 "PESD5V0L1BA" SOD323 5760,525 r270 top
D24 "PESD5V0L1BA" SOD323 5175,525 r270 top
D25 "PESD5V0L1BA" SOD323 4854.33,586.61 r90 bottom
D26 "PESD5V0L1BA" SOD323 4787.4,586.61 r90 bottom
D27 "PESD5V0L1BA" SOD323 5410,525 r270 top
D28 "PESD5V0L1BA" SOD323 5290,525 r270 top
D29 "SRV05-4" SOT23-6 150,3455 r180 bottom
D30 "SRV05-4" SOT23-6 496.06,2598.43 r90 bottom
D31 "LED GREEN" LED0603 2525,2055 r180 top
D32 "PESD1CAN" PESD2CAN 6511.81,59.06 r0 bottom
D34 "MM3Z6V2ST1G" SOD323F 7000,133.86 r270 bottom
D35 "PESD36VS1UJ" SOD323 7085,133.86 r270 bottom
D36 "PESD5V0L1BA" SOD323 7078.74,360.24 r90 bottom
D37 "MM3Z6V2ST1G" SOD323F 7275.59,133.86 r270 bottom
D38 "PESD5V0L1BA" SOD323 7196.85,360.24 r90 bottom
D39 "PESD36VS1UJ" SOD323 7196.85,133.86 r270 bottom
D40 "PESD5V0L1BA" SOD323 7314.96,360.24 r90 bottom
D41 "MM3Z6V2ST1G" SOD323F 681.1,464.57 r0 bottom (schematic designator D4)
D42 "1N5819HW" 1N5819 854.33,444.88 r0 bottom (schematic designator D5)
D43 "PESD5V0L1BA" SOD323 7433.07,360.24 r90 bottom
D44 "PESD36VS1UJ" SOD323 5880,525 r270 top
D45 "PESD5V0L1BA" SOD323 7551.18,360.24 r90 bottom
D46 "PESD36VS1UJ" SOD323 6000,525 r270 top
D47 "PESD36VS1UJ" SOD323 5585,210 r180 bottom
D48 "PESD36VS1UJ" SOD323 5820,210 r180 bottom
F1 "2A/16V" 2920 5082.68,11.81 r0 bottom
J1 "POWER IN" 3030WR-S-2*2P 476.38,161.42 r0 top locked
J2 "BOOT MODE" HDR1X2 5078.74,4039.37 r180 top
J3 "SI-51005-F" SI-51005-F 4267.72,208.66 r0 top locked
J4 "TOUCH PANEL" FPC1.0-DR-SMD-6P-F2.0 6200.79,1783.46 r0 bottom locked
J5 "MIC & RST-PB" FPC1.0-DR-SMD-4P-F2.0 7874.02,3244.09 r270 top locked
J6 "SPEAKER" 1250WV-S-2P 4845,730 r0 top
J7 "USB OTG" MINIUSB-TYPEAB 122.05,3519.69 r90 top locked
J8 "SIMCARD" SIM_CARD1 555.12,2641.73 r0 top locked
J9 "SIM7100-PCIE" MINI-PCIE 1342.52,2047.24 r0 top locked
J10 "GPS ANT" ANT 7745,3960.63 r270 top
J11 "DEBUG UART" HDR1X3 4476.38,4039.37 r0 top
J12 "Header 8X2" 3030WR-S-2*8P 5586.61,161.42 r0 top locked
J13 "Header 10X2" 3030WR-S-2*10P 7019.69,161.42 r0 top locked
L1 "BNX003-01" BNX002-001 118.11,500 r180 top
L2 "8.2uH/3A" IND_10X10 2346.46,980.32 r90 top
L3 "8.2uH/3A" IND_10X10 1326.77,125.98 r90 top (schematic designator L2)
L4 "8.2uH/3A" IND_10X10 1326.77,980.32 r90 top (schematic designator L2)
L5 "8.2uH/3A" IND_10X10 2346.46,125.98 r90 top (schematic designator L2)
L6 "120ohm/100MHz 1A" 0603 3960,980 r90 top
L7 "4.7uH/1A" IND-4.7UH-1A 4283.46,1240.16 r0 top
L8 "120ohm/100MHz 1A" 0603 4115,1345 r0 top
L9 "4.7uH/1A" IND-4.7UH-1A 7421.26,2216.54 r270 top
L10 "10uH/1.5A" IND-10UH-1.5A 6681.1,2059.06 r90 top
L11 "120ohm/100MHz 1A" 0603 6030.36,3139.26 r270 bottom
L12 "120ohm/100MHz 1A" 0603 6510,3055 r90 bottom
L13 "120ohm/100MHz 1A" 0603 6117.67,3275.59 r270 bottom
L14 "120ohm/100MHz 1A" 0603 6105.86,2893.7 r270 bottom
L15 "120ohm/100MHz 1A" 0603 6031.18,3832.41 r270 bottom
L16 "120ohm/100MHz 1A" 0603 6510,3750 r90 bottom
L17 "120ohm/100MHz 1A" 0603 6117.8,3970.2 r270 bottom
L18 "120ohm/100MHz 1A" 0603 6109.69,3588.2 r270 bottom
L19 "120ohm/100MHz 1A" 0603 4775.15,1622.05 r90 top
L20 "120ohm/100MHz 1A" 0603 5086.61,503.94 r0 top
L21 "120ohm/100MHz 1A" 0603 4850,985 r270 bottom
L22 "120ohm/100MHz 1A" 0603 4858.27,842.52 r180 top
L23 "120ohm/100MHz 1A" 0603 4783.46,842.52 r180 top
L24 "120ohm/100MHz 1A" 0603 5157.48,1011.81 r270 top
L25 "120ohm/100MHz 1A" 0603 5291.34,503.94 r180 bottom
L26 "120ohm/100MHz 1A" 0603 5409.45,503.94 r180 bottom
L27 "120ohm/100MHz 1A" 0603 5585,870 r270 bottom
L28 "120ohm/100MHz 1A" 0603 5905.51,897.64 r270 top
L29 "120ohm/100MHz 1A" 0603 280,3635 r270 top
L30 "120ohm/100MHz 1A" 0603 279.53,3413.39 r270 top
L31 "27nH(DNP)" 0603 7625,3927.76 r180 top
M1 "IMX6Q-CPU-BOARD" IMX6-CPU-BOARD 5641.73,3834.65 r180 top locked
M2 "LVDS-LCD" FPC0.5-DR-SMD-XP-F(40P) 6811.02,2255.91 r0 bottom locked
Q1 "FQD7P20" FQD7P20 374.02,1153.54 r90 bottom
Q2 "9012" NPN 303.15,1000 r180 bottom
Q3 "S9014" NPN 909.45,3.94 r90 bottom
Q4 "BSS138P" NPN 2835.44,3254.13 r270 top
Q5 "S9014" NPN 3500,602.36 r270 top
Q6 "BC857C-7-F" NPN 7770,2420 r180 top
Q7 "BC850CLT1G" NPN 7700,2710 r180 top
Q8 "IRLML6402" MOSFET 795.28,3909.45 r180 top
Q9 "BSS138P" NPN 862.2,3830.71 r0 top
Q10 "S9014" NPN 6850.39,43.31 r180 bottom
Q11 "S9014" NPN 7500,43.31 r180 bottom
Q12 "S9014" NPN 909.45,303.15 r90 bottom (schematic designator Q3)
Q13 "BSS138P" NPN 6185.04,188.98 r270 bottom
Q14 "BSS138P" NPN 6184.16,444.88 r270 bottom
R1 "10K" 0402 263.78,937.01 r0 bottom
R2 "10K/0.5W" 1812 562.99,854.33 r180 bottom
R3 "10K/0.5W" 1812 562.99,1019.69 r180 bottom
R4 "47K" 0402 3460,2962.32 r90 top
R5 "10K" 0402 3551.81,3062.16 r180 top
R6 "15K(0.5W)" 1812 755.91,47.24 r180 bottom
R7 "1.1K/1%" 0402 2684.85,1429.13 r180 top
R8 "1.74K/1%" 0402 2684.85,1381.89 r180 top
R9 "47K" 0402 880,205 r180 bottom
R10 "0(DNP)" 0402 2950.08,3507.87 r270 top
R11 "10K" 0402 2737.02,3116.34 r180 top
R12 "1.1K/1%" 0402 1665.17,574.8 r180 top (schematic designator R7)
R13 "3.16K/1%" 0402 1665.17,527.56 r180 top (schematic designator R8)
R14 "10K" 0402 2710,3660 r270 top
R15 "4.7K" 0402 2855.13,3325 r180 top
R16 "10K" 0402 1415,710 r180 top (schematic designator R21)
R17 "1.1K/1%" 0402 1665.17,1429.13 r180 top (schematic designator R7)
R18 "1.1K/1%" 0402 2684.85,574.8 r180 top (schematic designator R7)
R19 "1.74K/1%" 0402 1665.17,1381.89 r180 top (schematic designator R8)
R20 "9.09K/1%" 0402 2684.85,527.56 r180 top (schematic designator R8)
R21 "10K" 0402 1413.39,1562.99 r180 top
R22 "10K" 0402 2435,710 r180 top (schematic designator R21)
R23 "1.5K" 0402 5250,1895 r0 top
R24 "1.5K" 0402 5250,1940 r0 top
R25 "1.5K" 0402 5250,1985 r0 top
R26 "1.5K" 0402 5250,2030 r0 top
R27 "1.5K" 0402 6145,1925 r270 bottom
R28 "1.5K" 0402 6095,1925 r270 bottom
R29 "4.7K" 0402 3430,2475 r180 bottom
R30 "0(DNP)" 0402 3430,2430 r180 bottom
R31 "0" 0402 3400,2285 r180 bottom
R32 "0" 0402 3780,1225 r180 bottom
R33 "270" 0402 3930,879.87 r90 bottom
R34 "4.7K" 0402 4015.75,1354.33 r270 bottom
R35 "270" 0402 3811.02,822.83 r180 top
R36 "10K" 0402 3968.5,1354.33 r270 bottom
R37 "10K" 0402 4300,1220 r180 bottom
R38 "10K(DNP)" 0402 4300,1265 r180 bottom
R39 "1.5K" 0402 4125.98,1354.33 r270 bottom
R40 "0" 0402 4300,1310 r180 bottom
R41 "100" 0402 3562.99,350.39 r0 top
R42 "22" 0402 3780,955 r180 bottom
R43 "4.7K" 0402 3420,605 r180 top
R45 "2.37K/1%" 0402 4315,940 r0 bottom
R46 "10K" 0402 3780,1135 r0 bottom
R47 "10K(DNP)" 0402 3780,1090 r0 bottom
R48 "10K(DNP)" 0402 3620,696.85 r90 top
R49 "10K(DNP)" 0402 3836.3,879.87 r90 bottom
R50 "10K(DNP)" 0402 3700,1175 r90 bottom
R51 "10K" 0402 3700,1085 r270 bottom
R52 "10K" 0402 3780.13,1045 r180 bottom
R53 "10K" 0402 3780,1000 r180 bottom
R54 "10K" 0402 3780,1270 r180 bottom
R55 "10K" 0402 3780,1180 r180 bottom
R56 "10K" 0402 3574.8,696.85 r90 top
R57 "10K" 0402 3883.54,879.87 r270 bottom
R58 "2K" 0402 7805,2490 r0 top
R59 "820" 0402 7760,2675 r270 top
R60 "10" 0402 7835,2260 r0 top
R61 "154K/1%" 0402 7490,1800 r270 top
R62 "120/1%" 0603 7007.87,1826.77 r270 top
R63 "39K" 0402 7355,1800 r90 top
R64 "665/1%" 0603 7007.87,1751.97 r90 top
R65 "17.8K/1%" 0402 7445,1800 r90 top
R66 "2.2K" 0402 7334.65,2649.61 r90 bottom
R67 "12.7K/1%" 0402 7265,2580 r90 top
R68 "7.32K/1%" 0402 7175,2580 r270 top
R69 "20K" 0402 6232.28,1944.88 r90 top
R70 "1K" 0402 6169.29,1803.15 r90 top
R71 "2.2K" 0402 6279.53,1944.88 r90 top
R72 "0(DNP)" 0402 6330,2255 r180 top
R73 "0" 0402 6330,2300 r180 top
R74 "0" 0805 6790,1650 r0 top
R75 "2.2K" 0402 6559.06,1799.21 r90 top
R76 "0.825/1%(1/8W)" 0805 6712.6,1653.1 r270 top
R77 "39" 0402 6345.33,3300.67 r270 top
R78 "39" 0402 6392.57,3300.67 r90 top
R79 "0(DNP)" 0402 6022.74,3153.54 r0 top
R80 "4.7K" 0402 6022.74,3106.3 r0 top
R81 "4.7K" 0402 6475.94,3098.43 r180 top
R82 "1.69K/1%" 0402 6475.94,3192.91 r180 top
R83 "1M" 0402 6479.87,2905.51 r270 top
R84 "0" 0402 6014.62,3300.67 r90 top
R85 "0" 0402 6555,3145 r180 bottom
R86 "39" 0402 6393.39,3993.83 r90 top
R87 "39" 0402 6346.14,3993.83 r270 top
R88 "4.7K" 0402 6022.87,3848.16 r0 top
R89 "0(DNP)" 0402 6022.87,3800.91 r0 top
R90 "4.7K" 0402 6476.06,3793.04 r180 top
R91 "1.69K/1%" 0402 6476.06,3887.53 r180 top
R92 "1M" 0402 6480,3600.13 r270 top
R93 "0" 0402 6015.43,3993.83 r90 top
R94 "0" 0402 6555,3835 r180 bottom
R95 "0" 0402 5094.49,1562.99 r0 top
R96 "0(DNP)" 0402 5188.98,1610.24 r0 top
R97 "150K" 0402 5094.49,1657.48 r180 top
R98 "2.2K" 0402 5188.98,1657.48 r0 top
R99 "100K" 0402 5094.49,1704.72 r180 top
R100 "0" 0402 5188.98,1562.99 r180 top
R101 "0(DNP)" 0402 5094.49,1515.75 r180 top
R102 "10K" 0402 5105,685 r0 top
R103 "20" 0402 5105,775 r180 top
R104 "0(DNP)" 0402 5125,1157.48 r270 bottom
R105 "0(DNP)" 0402 5125,1245 r270 bottom
R106 "22" 0402 4890,1330 r270 top
R107 "0" 0402 5025,1330 r270 top
R108 "0" 0402 4980,1330 r270 top
R109 "0" 0402 4935,1330 r270 top
R110 "22" 0402 4770,1075 r0 top
R111 "10K" 0402 5291.78,692.91 r180 top
R112 "10K" 0402 5409.45,692.91 r180 top
R113 "20" 0402 5291.78,787.4 r180 top
R114 "20" 0402 5409.45,787.4 r180 top
R115 "22" 0402 5625,1215 r270 top
R116 "0" 0402 5760,1215 r270 top
R117 "0" 0402 5715,1215 r270 top
R118 "0" 0402 5670,1215 r270 top
R119 "22" 0402 5510,965 r0 top
R120 "47K" 0402 740.16,3972.44 r0 top
R121 "47K" 0402 881.89,3767.72 r0 top
R122 "100K(DNP)" 0402 3425,2180 r0 top
R123 "100" 0402 47.24,3811.02 r270 top
R124 "100K(DNP)" 0402 535.43,4082.68 r180 top
R125 "4.7K" 0402 377.95,3996.06 r180 top
R126 "47K" 0402 1389.76,1724.41 r270 top
R127 "3.3K" 0402 1200.79,1795.28 r270 bottom
R128 "2.2K" 0402 1287.4,1795.28 r90 bottom
R129 "100K" 0402 1555.12,2000 r270 bottom
R130 "(DNP)" 0402 1507.87,2000 r270 bottom
R131 "270" 0402 2470,2070 r270 top
R132 "0" 0402 1785,2095 r90 bottom
R133 "0" 0402 1830,2095 r90 bottom
R134 "20K" 0402 7193.03,3047.24 r270 top
R135 "1K" 0402 7248.15,3232.28 r270 top
R136 "2.2K" 0402 7145.79,3047.24 r270 top
R137 "0(DNP)" 0402 6889.88,3964.57 r0 top
R138 "0(DNP)" 0402 6889.88,3917.32 r0 top
R139 "0" 0402 7565,3850 r90 top
R140 "0(DNP)" 0402 7590,3712.6 r0 top
R141 "10(DNP)" 0402 7635,3831.34 r0 top
R142 "62/(1/4W)" 1206 6335,610 r270 top
R143 "0(DNP)" 0402 6110,690 r270 top
R144 "62(1/4W)" 1206 6195,495 r90 top
R145 "0(DNP)" 0402 6413.39,830.71 r90 top
R146 "0" 0402 6413.39,740.16 r90 top
R147 "120(1/4W)" 1206 6657.48,614.17 r180 top
R148 "1K" 0402 6531.5,1066.93 r270 top
R149 "47K" 0402 6791.34,185.04 r180 bottom
R150 "47K(DNP)" 0402 7283.46,1070.86 r0 top
R151 "200" 0402 7263.78,822.83 r90 bottom
R152 "15K(1/8W)" 0805 6925.2,82.68 r90 bottom
R153 "47K" 0402 6830.71,-15.75 r0 bottom
R154 "47K" 0402 7480.31,185.04 r0 bottom
R155 "47K(DNP)" 0402 7444.88,1070.87 r0 top
R156 "200" 0402 7425.2,822.83 r90 bottom
R157 "15K(1/8W)" 0805 7350.39,82.68 r90 bottom
R158 "47K" 0402 7480.31,-15.75 r0 bottom
R159 "47K(DNP)" 0402 7606.3,1070.87 r0 top
R160 "200" 0402 7586.61,822.83 r90 bottom
R161 "47K" 0402 5250,2075 r180 top
R162 "15K(0.5W)" 1812 755.91,346.46 r180 bottom (schematic designator R6)
R163 "47K" 0402 880,500 r180 bottom (schematic designator R9)
R164 "47K(DNP)" 0402 7767.72,1070.87 r0 top
R165 "200" 0402 7748.03,822.83 r90 bottom
R166 "10K" 0402 6314.96,27.56 r0 bottom
R167 "47K(DNP)" 0402 7929.13,1070.87 r0 top
R168 "200" 0402 7909.45,822.83 r90 bottom
R169 "10K" 0402 6314.96,283.46 r0 bottom
U1 "NC7SP126P5X" SC70 3524.25,2920.43 r0 top
U2 "LM22676MR-ADJ" PSO8 2570.87,1279.53 r90 top
U3 "NC7SP125P5X" SC70 2709.46,3175.39 r0 top
U4 "74HC1G04" SOT753 2551.98,3163.58 r90 top
U5 "NC7SP08P5X" SC70 2830.71,3464.57 r0 top
U6 "74HC1G04" SOT753 2555.12,3444.88 r90 top
U7 "LM22676MR-ADJ" PSO8 1551.18,425.2 r90 top (schematic designator U2)
U8 "NC7SZ74K8X" US8 2700.79,3448.82 r0 top
U9 "LM22676MR-ADJ" PSO8 1551.18,1279.53 r90 top (schematic designator U2)
U10 "LM22676MR-ADJ" PSO8 2570.87,425.2 r90 top (schematic designator U2)
U11 "LM1117MPX-1.8" AMS1117 5902.1,1675.71 r180 top
U12 "AR8031" QFN48 4157.48,1192.91 r270 bottom
U13 "LM1117MPX-ADJ" AMS1117 7086.61,1921.26 r0 top
U14 "TPS73625DBVT" SOT23-5 7185.04,2629.92 r0 bottom
U15 "TPS61085DGK" MSOP 7377.95,1909.45 r0 top
U16 "LM7321MF" SOT23-5 7259.84,2492.13 r180 top
U17 "TPS27081ADDC" SOT23-6 6236.03,1744.09 r0 top
U18 "TPS61165DBVR" SOT23-6 6708.66,1862.2 r180 top
U19 "ADV7180BCPZ" LFCSP40 6160.98,2956.69 r90 top
U20 "ADV7180BCPZ" LFCSP40 6161.1,3651.31 r90 top
U21 "MAX9814ETD" TDFN14 4889.76,1633.86 r0 top
U22 "WM8962ECS" BGA49 5019.69,1220.48 r270 top
U23 "WM8962" BGA49 5755.91,1106.3 r270 top
U24 "MIC2026-1YM" SO8 539.37,3893.89 r180 top
U25 "TPS27081ADDC" SOT23-6 1201.03,1763.78 r270 top
U26 "TPS27081ADDC" SOT23-6 7181.22,3251.97 r180 top
U27 "N303" NEO-6 7484.37,3452.76 r0 top
U28 "TJA1040T" SO8 6263.78,850.39 r180 top
U29 "NLSV1T34DFT2G" SC70 6122.05,1055.12 r0 top
U30 "MAX3232E" SO-16 7114.17,594.49 r90 top
U31 "NLSV1T34DFT2G" SC70 6649.61,1055.12 r0 top
U32 "MAX485ESA" SO8 6602.36,850.39 r180 top
U33 "TLP127" TLP127 7311.02,866.14 r0 top
U34 "TLP127" TLP127 7473.43,866.14 r0 top
U35 "TLP127" TLP127 7635.83,866.14 r0 top
U36 "TLP127" TLP127 7798.23,866.14 r0 top
U37 "74HC1G04" SOT753 6330.71,90.55 r90 bottom
U38 "TLP127" TLP127 7960.63,866.14 r0 top
U39 "74HC1G04" SOT753 6330.27,346.46 r90 bottom
Y1 "25MHZ" XTAL4_SX_3225 4370,1140 r270 bottom
Y2 "28.63636MHZ" XTAL4_SX_3225 6619.64,2858.27 r90 top
Y3 "28.63636MHZ" XTAL4_SX_3225 6619.76,3552.88 r90 top

## Footprints (in the part's own frame and the unit in brackets; to place one, negate y for a bottom-side part, rotate by r counter-clockwise, add the part's x,y. Pads: shape width x height; smd on the part's side, far side on the other; paste and mask are expansions set on the pad)
1N5819 [mm]
  rect 1x1 smd: 1(2.7,0) 2(0,0)
  silkscreen extent -1.1,-0.7 3.45,0.7
0402 [mil] "Chip Capacitor, Body 1.0x0.5mm, IPC High Density"
  rect 24x21 smd: 1(20.13,0) 2(-19.87,0)
  silkscreen extent -39,-18 39,18
0603 [mm]
  rect 1x0.9 smd: 1(0,0.8) 2(0,-0.8)
  silkscreen extent -0.8,-1.5 0.8,1.5
0805 [mm]
  rect 1.2x1.3 smd: 1(0,0) 2(1.8,0)
  silkscreen extent -0.8,-0.9 2.6,0.9
1206 [mm]
  rect 1.2x1.8 smd: 1(0,0) 2(3,0)
  silkscreen extent -0.9,-1.2 3.9,1.2
1210 [mm]
  rect 1.3x2.8 smd: 1(0,0) 2(3.1,0)
  silkscreen extent -0.9,-1.6 4,1.6
1250WV-S-2P [mm]
  rect 0.7x1.18 smd: 1(0,0) 2(-1.25,0)
  rect 1.9x2.4 smd: ""(-3.675,-2.56) ""(2.425,-2.56)
  silkscreen extent -4.9,-4.28 3.67,0
1812 [mm]
  rect 1.5x3.2 smd: 1(0,0) 2(4,0)
  silkscreen extent -1,-1.9 5,1.9
2920 [mm]
  rect 2x5.4 smd: 1(0,0) 2(8,0)
  silkscreen extent -1.3,-3 9.3,3
3030WR-S-2*2P [mm]
  rect 1.27x2.92 smd: 1(-1.5,5.05) 2(-1.5,0.43) 3(1.5,5.05) 4(1.5,0.43)
  rect 3.43x1.65 smd: ""(-5.4,-5.05) ""(5.4,-5.05)
  silkscreen extent -4.8,-10.1 4.8,-0.1
3030WR-S-2*8P [mm]
  rect 1.27x2.92 smd: 1(-10.5,5.05) 2(-10.5,0.43) 3(-7.5,5.05) 4(-7.5,0.43) 5(-4.5,5.05) 6(-4.5,0.43) 7(-1.5,5.05) 8(-1.5,0.43) 9(1.5,5.05) 10(1.5,0.43) 11(4.5,5.05) 12(4.5,0.43) 13(7.5,5.05) 14(7.5,0.43) 15(10.5,5.05) 16(10.5,0.43)
  rect 3.43x1.65 smd: ""(-14.4,-5.05) ""(14.4,-5.05)
  silkscreen extent -14,-10.1 14,-0.1
3030WR-S-2*10P [mm]
  rect 1.27x2.92 smd: 1(-13.5,5.05) 2(-13.5,0.43) 3(-10.5,5.05) 4(-10.5,0.43) 5(-7.5,5.05) 6(-7.5,0.43) 7(-4.5,5.05) 8(-4.5,0.43) 9(-1.5,5.05) 10(-1.5,0.43) 11(1.5,5.05) 12(1.5,0.43) 13(4.5,5.05) 14(4.5,0.43) 15(7.5,5.05) 16(7.5,0.43) 17(10.5,5.05) 18(10.5,0.43) 19(13.5,5.05) 20(13.5,0.43)
  rect 3.43x1.65 smd: ""(-17.4,-5.05) ""(17.4,-5.05)
  silkscreen extent -17,-10.1 17,-0.1
7343 [mm]
  rect 4x2.5 smd: 1(0,3.3) 2(0,-3.3)
  silkscreen extent -2.2,-4.8 2.2,4.8
AMS1117 [mm]
  rect 1x1.5 smd: 1(-2.3,0) 2(0,0) 3(2.3,0)
  rect 3.3x1.5 smd: 4(0,6.3)
  silkscreen extent -3.3,1 3.3,5.3
ANT [mm]
  rect 1x1 smd: 1(0,-1.5)
  rect 1x2.2 smd: 2(1.5,0) 3(-1.5,0)
  silkscreen extent -1.5,-1.5 1.5,1.5
BGA49 [mil] "BGA49_0P5_3P62X4"
  round 10 smd: A1(0,0) A2(19.69,0) A3(39.37,0) A4(59.06,0) A5(78.75,0) A6(98.43,0) A7(118.12,0) B1(0,-19.69) B2(19.69,-19.69) B3(39.37,-19.69) B4(59.06,-19.69) B5(78.75,-19.69) B6(98.43,-19.69) B7(118.12,-19.69) C1(0,-39.37) C2(19.69,-39.37) C3(39.37,-39.37) C4(59.06,-39.37) C5(78.75,-39.37) C6(98.43,-39.37) C7(118.12,-39.37) D1(0,-59.06) D2(19.69,-59.06) D3(39.37,-59.06) D4(59.06,-59.06) D5(78.75,-59.06) D6(98.43,-59.06) D7(118.12,-59.06) E1(0,-78.75) E2(19.69,-78.75) E3(39.37,-78.75) E4(59.06,-78.75) E5(78.75,-78.75) E6(98.43,-78.75) E7(118.12,-78.75) F1(0,-98.43) F2(19.69,-98.43) F3(39.37,-98.43) F4(59.06,-98.43) F5(78.75,-98.43) F6(98.43,-98.43) F7(118.12,-98.43) G1(0,-118.12) G2(19.69,-118.12) G3(39.37,-118.12) G4(59.06,-118.12) G5(78.75,-118.12) G6(98.43,-118.12) G7(118.12,-118.12)
  silkscreen extent -48,-145 137,27
BNX002-001 [mm]
  round 2 hole 1.2: 1(2.5,2.5) 2(-2.5,2.5) 3(2.5,-2.5) 4(5,0) 5(0,0) 6(-2.5,-2.5)
  silkscreen extent -6,-5.5 6,5.5
C3D03060F [mm]
  round 2 hole 1.1: 1(5.08,0) 2(0,0)
  silkscreen extent -3.1,1.1 8.3,19.6
DL-8*10.5 [mm]
  rect 1.5x4 smd: 1(0,3.5) 2(0,-3.5)
  silkscreen extent -4,-4 4,4
DL-10*10.5 [mm]
  rect 1.5x4.5 smd: 1(0,4.4) 2(0,-4.5)
  silkscreen extent -5,-5 5,5
FPC0.5-DR-SMD-XP-F(40P) [mm]
  rect 0.25x1.3 smd: 1(9.75,-1.54) 2(9.25,-1.54) 3(8.75,-1.54) 4(8.25,-1.54) 5(7.75,-1.54) 6(7.25,-1.54) 7(6.75,-1.54) 8(6.25,-1.54) 9(5.75,-1.54) 10(5.25,-1.54) 11(4.75,-1.54) 12(4.25,-1.54) 13(3.75,-1.54) 14(3.25,-1.54) 15(2.75,-1.54) 16(2.25,-1.54) 17(1.75,-1.54) 18(1.25,-1.54) 19(0.75,-1.54) 20(0.25,-1.54) 21(-0.25,-1.54) 22(-0.75,-1.54) 23(-1.25,-1.54) 24(-1.75,-1.54) 25(-2.25,-1.54) 26(-2.75,-1.54) 27(-3.25,-1.54) 28(-3.75,-1.54) 29(-4.25,-1.54) 30(-4.75,-1.54) 31(-5.25,-1.54) 32(-5.75,-1.54) 33(-6.25,-1.54) 34(-6.75,-1.54) 35(-7.25,-1.54) 36(-7.75,-1.54) 37(-8.25,-1.54) 38(-8.75,-1.54) 39(-9.25,-1.54) 40(-9.75,-1.54)
  rect 1.6x2.8 smd: ""(-11.75,1.54) ""(11.75,1.54)
  silkscreen extent -12.8,-2.5 12.8,3.2
FPC1.0-DR-SMD-4P-F2.0 [mm]
  rect 0.3x1.3 smd: 1(1.5,-1.54) 2(0.5,-1.54) 3(-0.5,-1.54) 4(-1.5,-1.54)
  rect 1.6x2.8 smd: ""(-4,1.54) ""(4,1.54)
  silkscreen extent -3.96,-1.03 4,3.54
FPC1.0-DR-SMD-6P-F2.0 [mm]
  rect 0.3x1.3 smd: 1(2.5,-1.54) 2(1.5,-1.54) 3(0.5,-1.54) 4(-0.5,-1.54) 5(-1.5,-1.54) 6(-2.5,-1.54)
  rect 1.6x2.8 smd: ""(-5,1.54) ""(5,1.54)
  silkscreen extent -5,-1 5,3.54
FQD7P20 [mil]
  rect 45x85 smd: 1(0,0) 2(179,0)
  rect 225x265 smd: 3(89,251)
  silkscreen extent -41,106 219,396
HDR1X2 [mm] "Connector; Header; 2 Position"
  rect 1.5x1.5 hole 0.9: 1(0,0)
  round 1.5 hole 0.9: 2(2.54,0)
  silkscreen extent -1.27,-1.27 3.81,1.27
HDR1X3 [mm] "Connector; Header; 3 Position"
  rect 1.5x1.5 hole 0.9: 1(0,0)
  round 1.5 hole 0.9: 2(2.54,0) 3(5.08,0)
  silkscreen extent -1.27,-1.27 6.35,1.27
IMX6-CPU-BOARD [mm]
  rect 1.6x0.3 smd: A1(2.6,49.5) A2(6,49.5) A3(2.6,49) A4(6,49) A5(2.6,48.5) A6(6,48.5) A7(2.6,48) A8(6,48) A9(2.6,47.5) A10(6,47.5) A11(2.6,47) A12(6,47) A13(2.6,46.5) A14(6,46.5) A15(2.6,46) A16(6,46) A17(2.6,45.5) A18(6,45.5) A19(2.6,45) A20(6,45) A21(2.6,44.5) A22(6,44.5) A23(2.6,44) A24(6,44) A25(2.6,43.5) A26(6,43.5) A27(2.6,43) A28(6,43) A29(2.6,42.5) A30(6,42.5) A31(2.6,42) A32(6,42) A33(2.6,41.5) A34(6,41.5) A35(2.6,41) A36(6,41) A37(2.6,40.5) A38(6,40.5) A39(2.6,40) A40(6,40) A41(2.6,39.5) A42(6,39.5) A43(2.6,39) A44(6,39) A45(2.6,38.5) A46(6,38.5) A47(2.6,38) A48(6,38) A49(2.6,37.5) A50(6,37.5) A51(2.6,37) A52(6,37) A53(2.6,36.5) A54(6,36.5) A55(2.6,36) A56(6,36) A57(2.6,35.5) A58(6,35.5) A59(2.6,35) A60(6,35) B1(2.6,25) B2(6,25) B3(2.6,24.5) B4(6,24.5) B5(2.6,24) B6(6,24) B7(2.6,23.5) B8(6,23.5) B9(2.6,23) B10(6,23) B11(2.6,22.5) B12(6,22.5) B13(2.6,22) B14(6,22) B15(2.6,21.5) B16(6,21.5) B17(2.6,21) B18(6,21) B19(2.6,20.5) B20(6,20.5) B21(2.6,20) B22(6,20) B23(2.6,19.5) B24(6,19.5) B25(2.6,19) B26(6,19) B27(2.6,18.5) B28(6,18.5) B29(2.6,18) B30(6,18) B31(2.6,17.5) B32(6,17.5) B33(2.6,17) B34(6,17) B35(2.6,16.5) B36(6,16.5) B37(2.6,16) B38(6,16) B39(2.6,15.5) B40(6,15.5) B41(2.6,15) B42(6,15) B43(2.6,14.5) B44(6,14.5) B45(2.6,14) B46(6,14) B47(2.6,13.5) B48(6,13.5) B49(2.6,13) B50(6,13) B51(2.6,12.5) B52(6,12.5) B53(2.6,12) B54(6,12) B55(2.6,11.5) B56(6,11.5) B57(2.6,11) B58(6,11) B59(2.6,10.5) B60(6,10.5) C1(60,52.5) C2(63.4,52.5) C3(60,52) C4(63.4,52) C5(60,51.5) C6(63.4,51.5) C7(60,51) C8(63.4,51) C9(60,50.5) C10(63.4,50.5) C11(60,50) C12(63.4,50) C13(60,49.5) C14(63.4,49.5) C15(60,49) C16(63.4,49) C17(60,48.5) C18(63.4,48.5) C19(60,48) C20(63.4,48) C21(60,47.5) C22(63.4,47.5) C23(60,47) C24(63.4,47) C25(60,46.5) C26(63.4,46.5) C27(60,46) C28(63.4,46) C29(60,45.5) C30(63.4,45.5) C31(60,45) C32(63.4,45) C33(60,44.5) C34(63.4,44.5) C35(60,44) C36(63.4,44) C37(60,43.5) C38(63.4,43.5) C39(60,43) C40(63.4,43) C41(60,42.5) C42(63.4,42.5) C43(60,42) C44(63.4,42) C45(60,41.5) C46(63.4,41.5) C47(60,41) C48(63.4,41) C49(60,40.5) C50(63.4,40.5) C51(60,40) C52(63.4,40) C53(60,39.5) C54(63.4,39.5) C55(60,39) C56(63.4,39) C57(60,38.5) C58(63.4,38.5) C59(60,38) C60(63.4,38) D1(60,22) D2(63.4,22) D3(60,21.5) D4(63.4,21.5) D5(60,21) D6(63.4,21) D7(60,20.5) D8(63.4,20.5) D9(60,20) D10(63.4,20) D11(60,19.5) D12(63.4,19.5) D13(60,19) D14(63.4,19) D15(60,18.5) D16(63.4,18.5) D17(60,18) D18(63.4,18) D19(60,17.5) D20(63.4,17.5) D21(60,17) D22(63.4,17) D23(60,16.5) D24(63.4,16.5) D25(60,16) D26(63.4,16) D27(60,15.5) D28(63.4,15.5) D29(60,15) D30(63.4,15) D31(60,14.5) D32(63.4,14.5) D33(60,14) D34(63.4,14) D35(60,13.5) D36(63.4,13.5) D37(60,13) D38(63.4,13) D39(60,12.5) D40(63.4,12.5) D41(60,12) D42(63.4,12) D43(60,11.5) D44(63.4,11.5) D45(60,11) D46(63.4,11) D47(60,10.5) D48(63.4,10.5) D49(60,10) D50(63.4,10) D51(60,9.5) D52(63.4,9.5) D53(60,9) D54(63.4,9) D55(60,8.5) D56(63.4,8.5) D57(60,8) D58(63.4,8) D59(60,7.5) D60(63.4,7.5)
  round 6 hole 4: MT13(63,57) MT14(3,57) MT15(3,3) MT16(63,3)
  round 6 on Top Paste: ""(3,57) ""(3,3) ""(63,57) ""(63,3)
  Keep-Out Layer circle w0.15: c2.8,33.95 r0.3
  Keep-Out Layer circle w0.15: c2.8,50.55 r0.3
  Keep-Out Layer circle w0.15: c2.8,9.45 r0.3
  Keep-Out Layer circle w0.15: c2.8,26.05 r0.3
  Keep-Out Layer circle w0.15: c60.2,36.95 r0.3
  Keep-Out Layer circle w0.15: c60.2,53.55 r0.3
  Keep-Out Layer circle w0.15: c60.2,6.45 r0.3
  Keep-Out Layer circle w0.15: c60.2,23.05 r0.3
  silkscreen extent 0,0 66,60
IND-4.7UH-1A [mil]
  rect 119x40 smd: 1(0,0) 2(0,78.74)
  silkscreen extent -68,-29 68,107
IND-10UH-1.5A [mm]
  rect 6.3x2.2 smd: 1(0,-2.05) 2(0,2.05)
  silkscreen extent -3.5,-3.5 3.5,3.5
IND_10X10 [mm]
  rect 4x2 smd: 1(0,4.5) 2(0,-4.5)
  silkscreen extent -5,-5 5,5
LED0603 [mm]
  rect 1x0.9 smd: 1(0,0) 2(0,-1.6)
  silkscreen extent -0.7,-2.5 0.7,0.6
LFCSP40 [mm]
  rect 0.6x0.3 smd: 1(0,0) 2(0,-0.5) 3(0,-1) 4(0,-1.5) 5(0,-2) 6(0,-2.5) 7(0,-3) 8(0,-3.5) 9(0,-4) 10(0,-4.5) 21(6,-4.5) 22(6,-4) 23(6,-3.5) 24(6,-3) 25(6,-2.5) 26(6,-2) 27(6,-1.5) 28(6,-1) 29(6,-0.5) 30(6,0)
  rect 0.3x0.6 smd: 11(0.75,-5.25) 12(1.25,-5.25) 13(1.75,-5.25) 14(2.25,-5.25) 15(2.75,-5.25) 16(3.25,-5.25) 17(3.75,-5.25) 18(4.25,-5.25) 19(4.75,-5.25) 20(5.25,-5.25) 31(5.25,0.75) 32(4.75,0.75) 33(4.25,0.75) 34(3.75,0.75) 35(3.25,0.75) 36(2.75,0.75) 37(2.25,0.75) 38(1.75,0.75) 39(1.25,0.75) 40(0.75,0.75)
  rect 4.25x4.25 smd: ""(3,-2.25)
  silkscreen extent -1.02,-5.25 6,0.75
MINI-MELF [mil]
  rect 60x60 smd: 1(135,0) 2(0,0)
  silkscreen extent -39,-39 173,39
MINI-PCIE [mm]
  rect 0.6x2 smd: 1(0.7,-4.1) 2(1.1,4.1) 3(1.5,-4.1) 4(1.9,4.1) 5(2.3,-4.1) 6(2.7,4.1) 7(3.1,-4.1) 8(3.5,4.1) 9(3.9,-4.1) 10(4.3,4.1) 11(4.7,-4.1) 12(5.1,4.1) 13(5.5,-4.1) 14(5.9,4.1) 15(6.3,-4.1) 16(6.7,4.1) 17(10.3,-4.1) 18(10.7,4.1) 19(11.1,-4.1) 20(11.5,4.1) 21(11.9,-4.1) 22(12.3,4.1) 23(12.7,-4.1) 24(13.1,4.1) 25(13.5,-4.1) 26(13.9,4.1) 27(14.3,-4.1) 28(14.7,4.1) 29(15.1,-4.1) 30(15.5,4.1) 31(15.9,-4.1) 32(16.3,4.1) 33(16.7,-4.1) 34(17.1,4.1) 35(17.5,-4.1) 36(17.9,4.1) 37(18.3,-4.1) 38(18.7,4.1) 39(19.1,-4.1) 40(19.5,4.1) 41(19.9,-4.1) 42(20.3,4.1) 43(20.7,-4.1) 44(21.1,4.1) 45(21.5,-4.1) 46(21.9,4.1) 47(22.3,-4.1) 48(22.7,4.1) 49(23.1,-4.1) 50(23.5,4.1) 51(23.9,-4.1) 52(24.3,4.1)
  round 1 hole 1.7 unplated: H1(0,0)
  round 1 hole 1.2: H2(25,0)
  rect 6x6 hole 4: MT17(0.4,48.05) MT18(24.6,48.05)
  rect 2.3x3.2 smd: ""(-2.15,-3.5) ""(27.1,-3.5)
  rect 6x6 on Top Paste: ""(0.4,48.05) ""(24.6,48.05)
  silkscreen extent -2.5,-1.6 27.5,51
MINIUSB-TYPEAB [mm]
  rect 0.5x2.5 smd: 1(1.6,0) 2(0.8,0) 3(0,0) 4(-0.8,0) 5(-1.6,0)
  rect 2x2.5 smd: 6(-4.4,5.5) 7(-4.4,0) 8(4.4,0) 9(4.4,5.5)
  Keep-Out Layer circle w0.152: c-2.2,2.6 r0.45
  Keep-Out Layer circle w0.152: c2.2,2.6 r0.45
  silkscreen extent -5.7,-1.5 5.7,7.1
MOSFET [mil]
  rect 36x36 smd: 1(0,0) 2(75,0)
  rect 36x50 smd: 3(38,80)
  silkscreen extent -20,-5 95,85
MSOP [mm]
  rect 0.45x1.45 smd: 1(0,0) 2(0.65,0) 3(1.3,0) 4(1.95,0) 5(1.95,4.4) 6(1.3,4.4) 7(0.65,4.4) 8(0,4.4)
  silkscreen extent -0.53,1 2.47,3.4
NEO-6 [mm]
  rect 1.8x0.8 smd: 1(0,0) 2(0,1.1) 3(0,2.2) 4(0,3.3) 5(0,4.4) 6(0,5.5) 7(0,6.6) 8(-0.1,9.6) 9(-0.1,10.7) 10(-0.1,11.8) 11(-0.1,12.9) 12(-0.1,14) 13(-12.3,14) 14(-12.3,12.9) 15(-12.3,11.8) 16(-12.3,10.7) 17(-12.3,9.6) 18(-12.4,6.6) 19(-12.4,5.5) 20(-12.4,4.4) 21(-12.4,3.3) 22(-12.4,2.2) 23(-12.4,1.1) 24(-12.4,0)
  silkscreen extent -12.4,-1 0,15
NPN [mil]
  rect 36x50 smd: 1(38,80)
  rect 36x36 smd: 2(0,0) 3(75,0)
  silkscreen extent -20,-5 95,85
PESD2CAN [mil]
  rect 36x36 smd: 1(0,0) 2(75,0)
  rect 36x50 smd: 3(38,80)
  silkscreen extent -20,-5 95,85
PSO8 [mm]
  rect 0.6x1.9 smd: 1(0,0) 2(1.27,0) 3(2.54,0) 4(3.81,0) 5(3.81,5.56) 6(2.54,5.56) 7(1.27,5.56) 8(0,5.56)
  rect 3x2.4 smd: 9(1.9,2.78)
  silkscreen extent -1.1,-0.12 4.4,4.7
QFN48 [mil]
  rrect0% 8x38 smd: 1(0,0) 2(15.74,0) 3(31.49,0) 4(47.24,0) 5(62.99,0) 6(78.74,0) 7(94.48,0) 8(110.23,0) 9(125.98,0) 10(141.73,0) 11(157.48,0) 12(173.22,0) 25(173.22,239.18) 26(157.48,239.18) 27(141.73,239.18) 28(125.98,239.18) 29(110.23,239.18) 30(94.48,239.18) 31(78.74,239.18) 32(62.99,239.18) 33(47.24,239.18) 34(31.49,239.18) 35(15.74,239.18) 36(0,239.18)
  rrect0% 38x8 smd: 13(206.2,32.98) 14(206.2,48.72) 15(206.2,64.47) 16(206.2,80.22) 17(206.2,95.97) 18(206.2,111.72) 19(206.2,127.46) 20(206.2,143.21) 21(206.2,158.96) 22(206.2,174.71) 23(206.2,190.46) 24(206.2,206.2) 37(-32.98,206.2) 38(-32.98,190.46) 39(-32.98,174.71) 40(-32.98,158.96) 41(-32.98,143.21) 42(-32.98,127.46) 43(-32.98,111.72) 44(-32.98,95.97) 45(-32.98,80.22) 46(-32.98,64.47) 47(-32.98,48.72) 48(-32.98,32.98)
  rect 150x150 smd: 49(86.61,119.59)
  silkscreen extent -39,-51 212,245
SC70 [mil]
  rect 16x32 smd: 1(0,0) 2(25.6,0) 3(51.2,0) 4(51.2,85) 5(0,85)
  silkscreen extent -25,9 76,76
SI-51005-F [mil]
  rect 60x60 hole 39.37: 1(0,250)
  round 60 hole 39.37: 2(-50,350) 3(-100,250) 4(-150,350) 5(-200,250) 6(-250,350) 7(-300,250) 8(-350,350) 9(-400,250) 10(-450,350)
  round 65 hole 40: 11(-440.16,540.16) 12(-340.16,540.16) 13(-109.84,540.16) 14(-9.84,540.16)
  round 118.11 hole 129.92 unplated: H1(-450,0) H2(0,0)
  round 84 hole 63: SH1(-529.92,120.08) SH2(79.92,120.08)
  silkscreen extent -543,-425 93,575
SIM_CARD1 [mm] "抽屉式SIM卡座"
  rect 6.604x1.524 smd: 1(12.15,2.3) 2(12.15,-0.2) 3(12.15,-2.7) ""(12.15,-10.1)
  rect 7.62x1.524 smd: 4(-11.85,2.3) 5(-11.85,-0.2) 6(-11.85,-2.7) ""(-11.85,-10.1)
  silkscreen extent -16.85,-12.3 16.01,12.33
SMC [mil]
  rect 99x130 smd: 1(0,0) 2(-267.72,0)
  silkscreen extent -280,-129 12,129
SO8 [mm] "Small Outline; 8 Leads; Body Width 3.9 mm; Pitch 1.27 mm"
  rect 0.6x2.2 smd: 1(-1.905,-2.6) 2(-0.635,-2.6) 3(0.635,-2.6) 4(1.905,-2.6) 5(1.905,2.6) 6(0.635,2.6) 7(-0.635,2.6) 8(-1.905,2.6)
  silkscreen extent -2.88,-2.72 2.5,1.1
SO-16 [mil] "Small Outline; 16 Leads; Body Width 5.6 mm; Pitch 1.27 mm"
  oval 24x80 smd: 1(0,0) 2(50,0) 3(100,0) 4(150,0) 5(200,0) 6(250,0) 7(300,0) 8(350,0) 9(350,220) 10(300,220) 11(250,220) 12(200,220) 13(150,220) 14(100,220) 15(50,220) 16(0,220)
  silkscreen extent -25,60 375,160
SOD123FL [mm]
  rect 0.9x1.2 smd: 1(0,0) 2(3.3,0)
  silkscreen extent -0.7,-0.9 4,0.9
SOD323 [mm]
  rect 1x1 smd: 1(-1.35,0) 2(1.35,0)
  silkscreen extent -2.1,-0.7 2.1,0.7
SOD323F [mm]
  rect 1x1 smd: 1(-1.35,0) 2(1.35,0)
  silkscreen extent -2.5,-0.7 2.1,0.7
SOT23-5 [mm]
  rect 0.5x1 smd: 1(0,0) 2(1,0) 3(2,0) 4(2,3) 5(0,3)
  silkscreen extent -0.7,0.6 2.7,2.4
SOT23-6 [mm]
  rect 0.5x1 smd: 1(0,0) 2(1,0) 3(2,0) 4(2,3) 5(1,3) 6(0,3)
  silkscreen extent -0.7,0.6 2.7,2.4
SOT753 [mm]
  rect 1x0.6 smd: 1(0,0)
  oval 1x0.6 smd: 2(0,-0.95) 3(0,-1.9) 4(3,-1.9) 5(3,0)
  silkscreen extent 0,-2.5 3,0.6
SOT-23 [mil]
  rect 36x36 smd: 1(0,0) 2(75,0)
  rect 36x50 smd: 3(38,80)
  silkscreen extent -20,-5 95,85
TDFN14 [mil]
  rect 26x8 smd: 1(0,0) 2(0,-15.74) 3(0,-31.49) 4(0,-47.24) 5(0,-62.99) 6(0,-78.74) 7(0,-94.48) 8(120.08,-94.48) 9(120.08,-78.74) 10(120.08,-62.99) 11(120.08,-47.24) 12(120.08,-31.49) 13(120.08,-15.74) 14(120.08,0)
  rect 71x95 smd: 15(60.04,-47.24)
  silkscreen extent -44,-115 128,21
TLP127 [mm]
  rect 0.8x1.2 smd: 1(-1.27,-3.5) 2(1.27,-3.5) 3(1.27,3.5) 4(-1.27,3.5)
  silkscreen extent -1.8,-2.5 1.8,2.5
US8 [mm]
  rect 0.3x1.5 smd: 1(0,-0.1) 2(0.5,-0.1) 3(1,-0.1) 4(1.5,-0.1) 5(1.5,2.8) 6(1,2.8) 7(0.5,2.8) 8(0,2.8)
  silkscreen extent -0.4,-1.2 1.9,2.5
XTAL4_SX_3225 [mil]
  rect 51x43 smd: 1(0,0) 2(90.56,0) 3(90.56,74.8) 4(0,74.8)
  silkscreen extent -37,-66 128,109